# Altium PCB main.PcbDoc
Units mil, origin at the board's own origin, x right, y up, seen from the top; angles counter-clockwise.
Board outline 1417.32 x 1377.95 mil, 4 copper layers (Top Layer, Power Layer 1, Power Layer 2, Bottom Layer), stack 38.209 mil thick; 103 components, 59 nets, 337 pads, 182 vias.
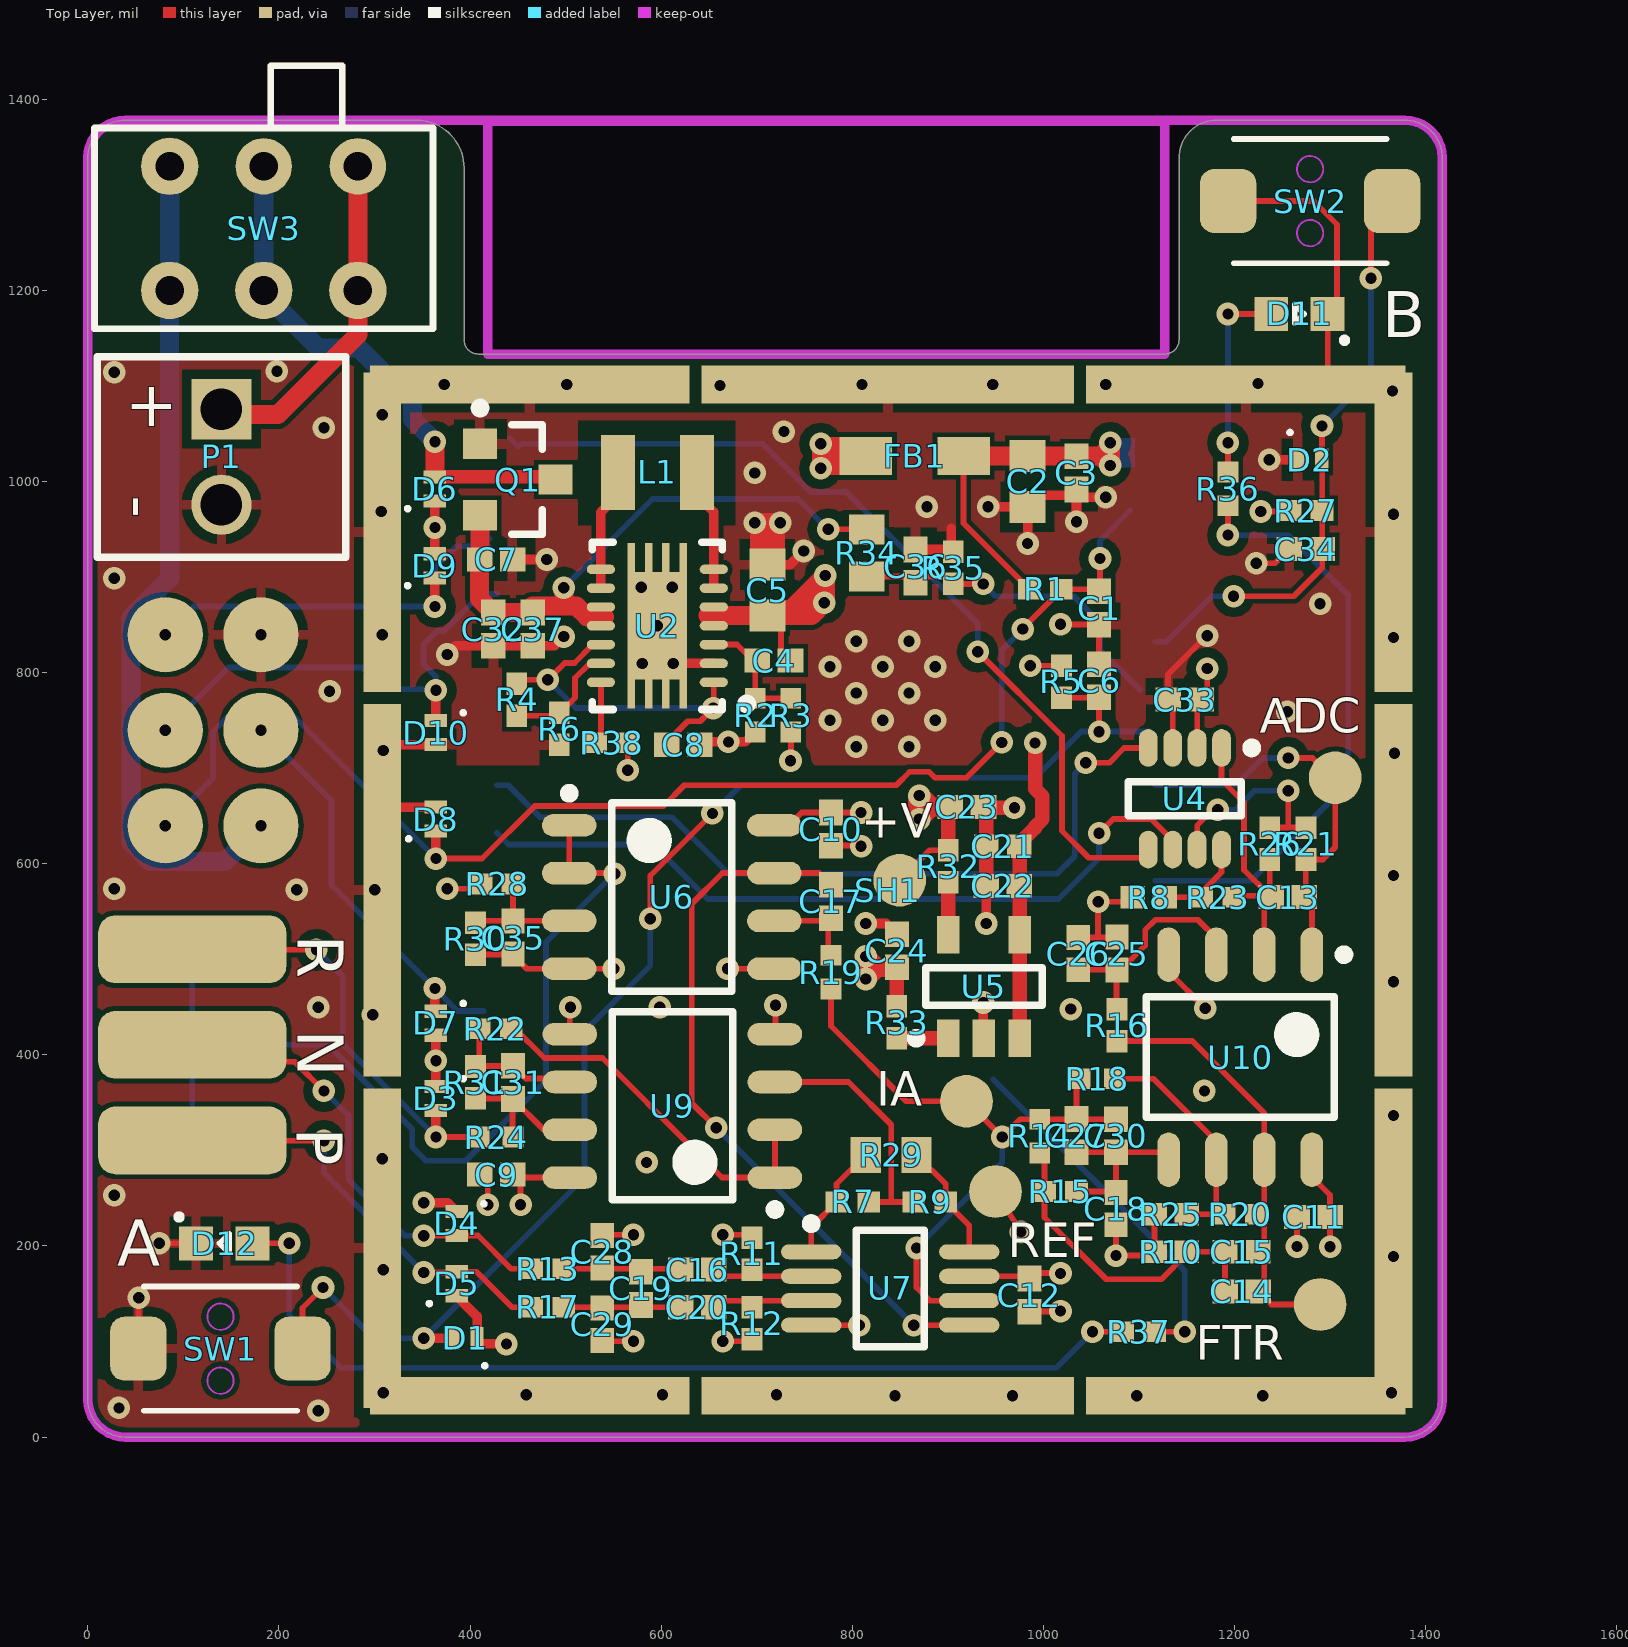
[diagram p0: Top Layer view]
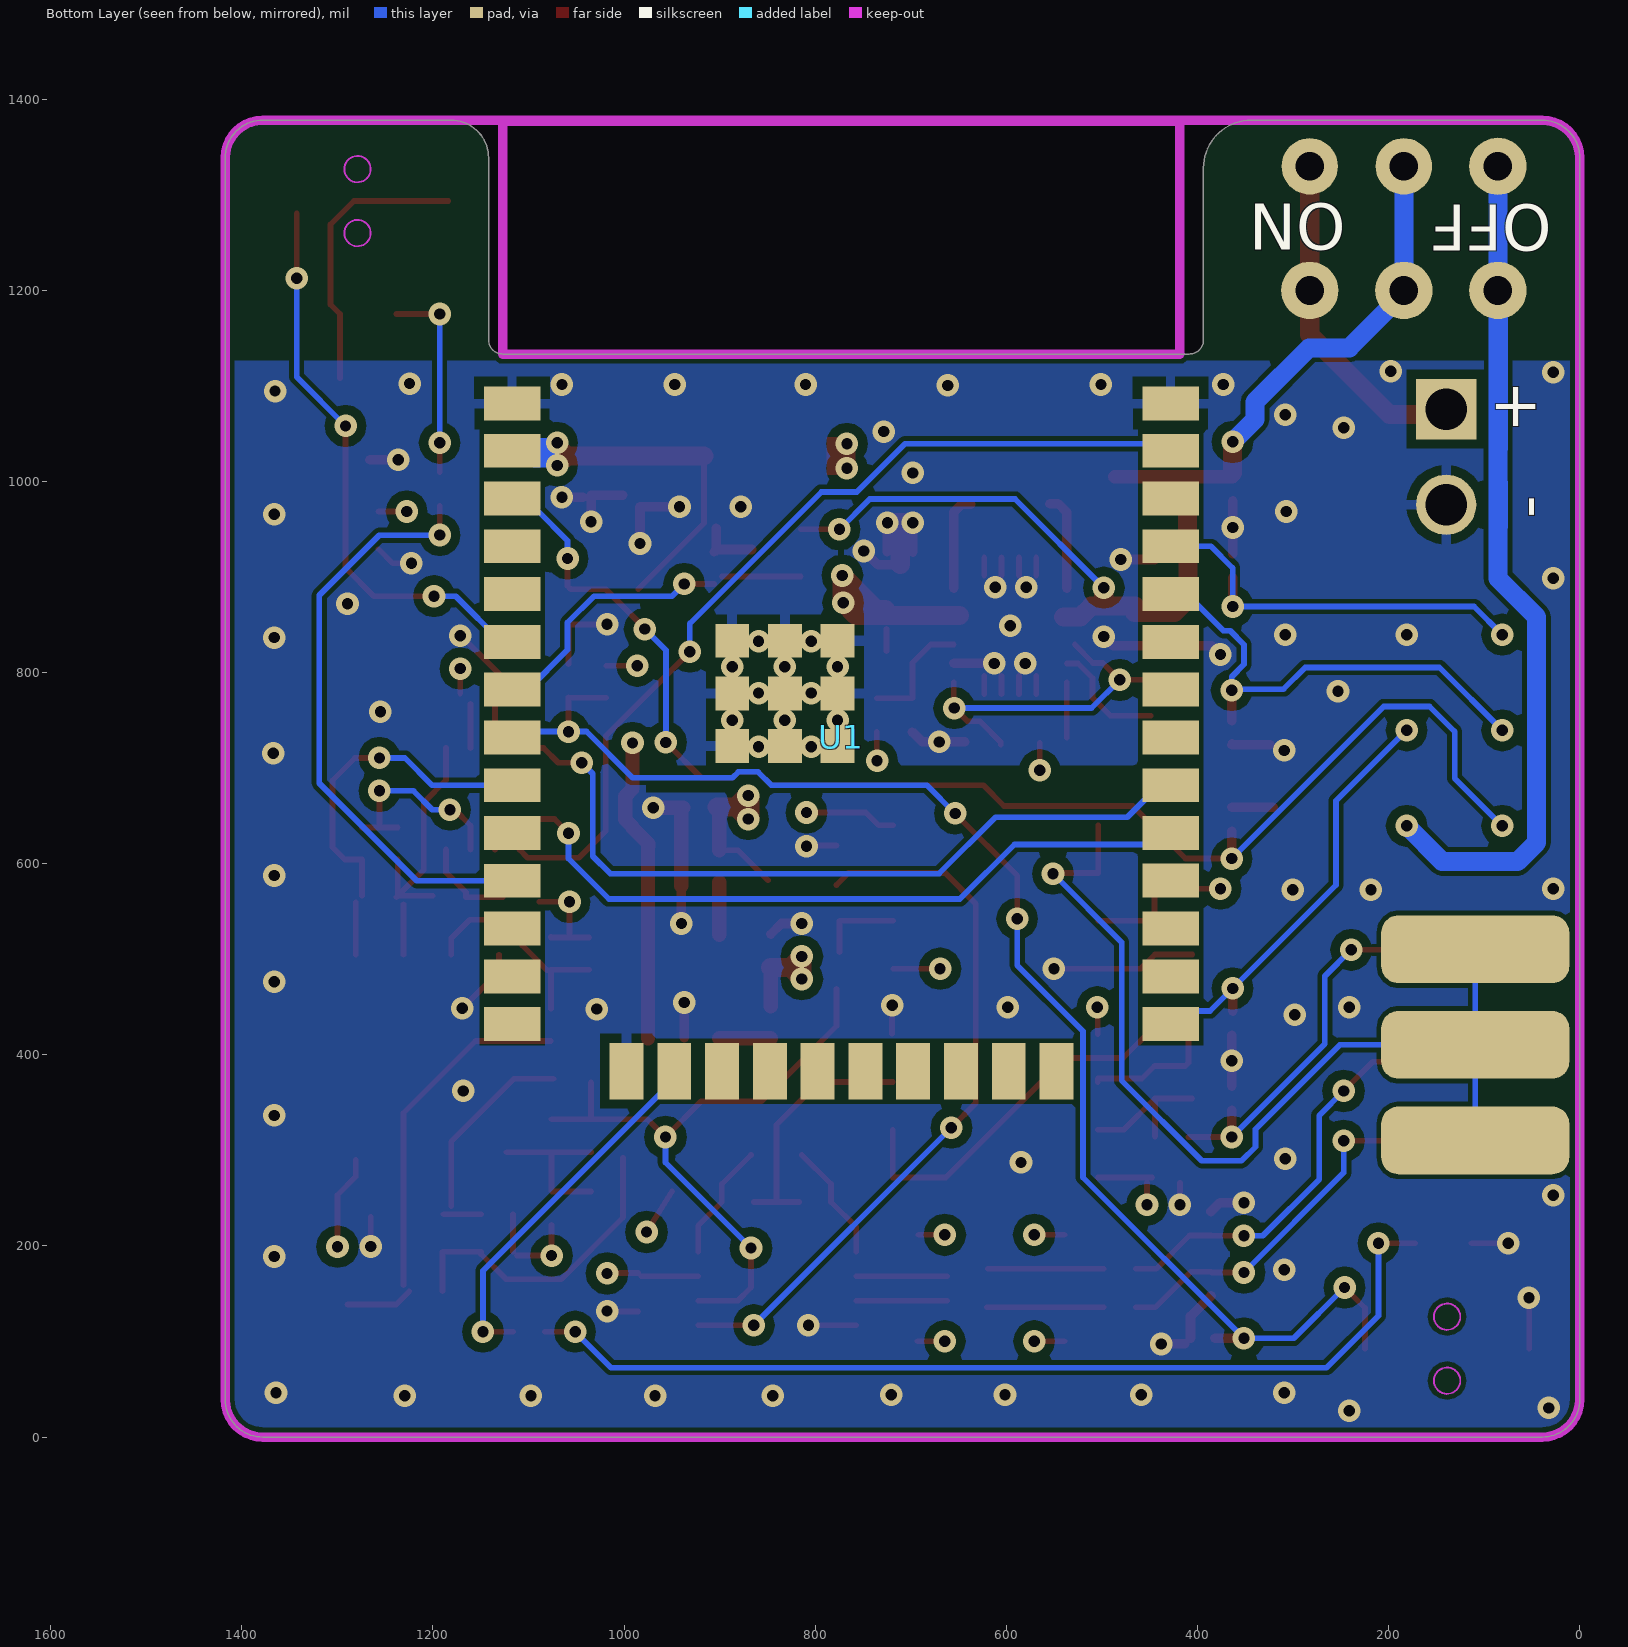
[diagram p1: Bottom Layer view, seen from below]
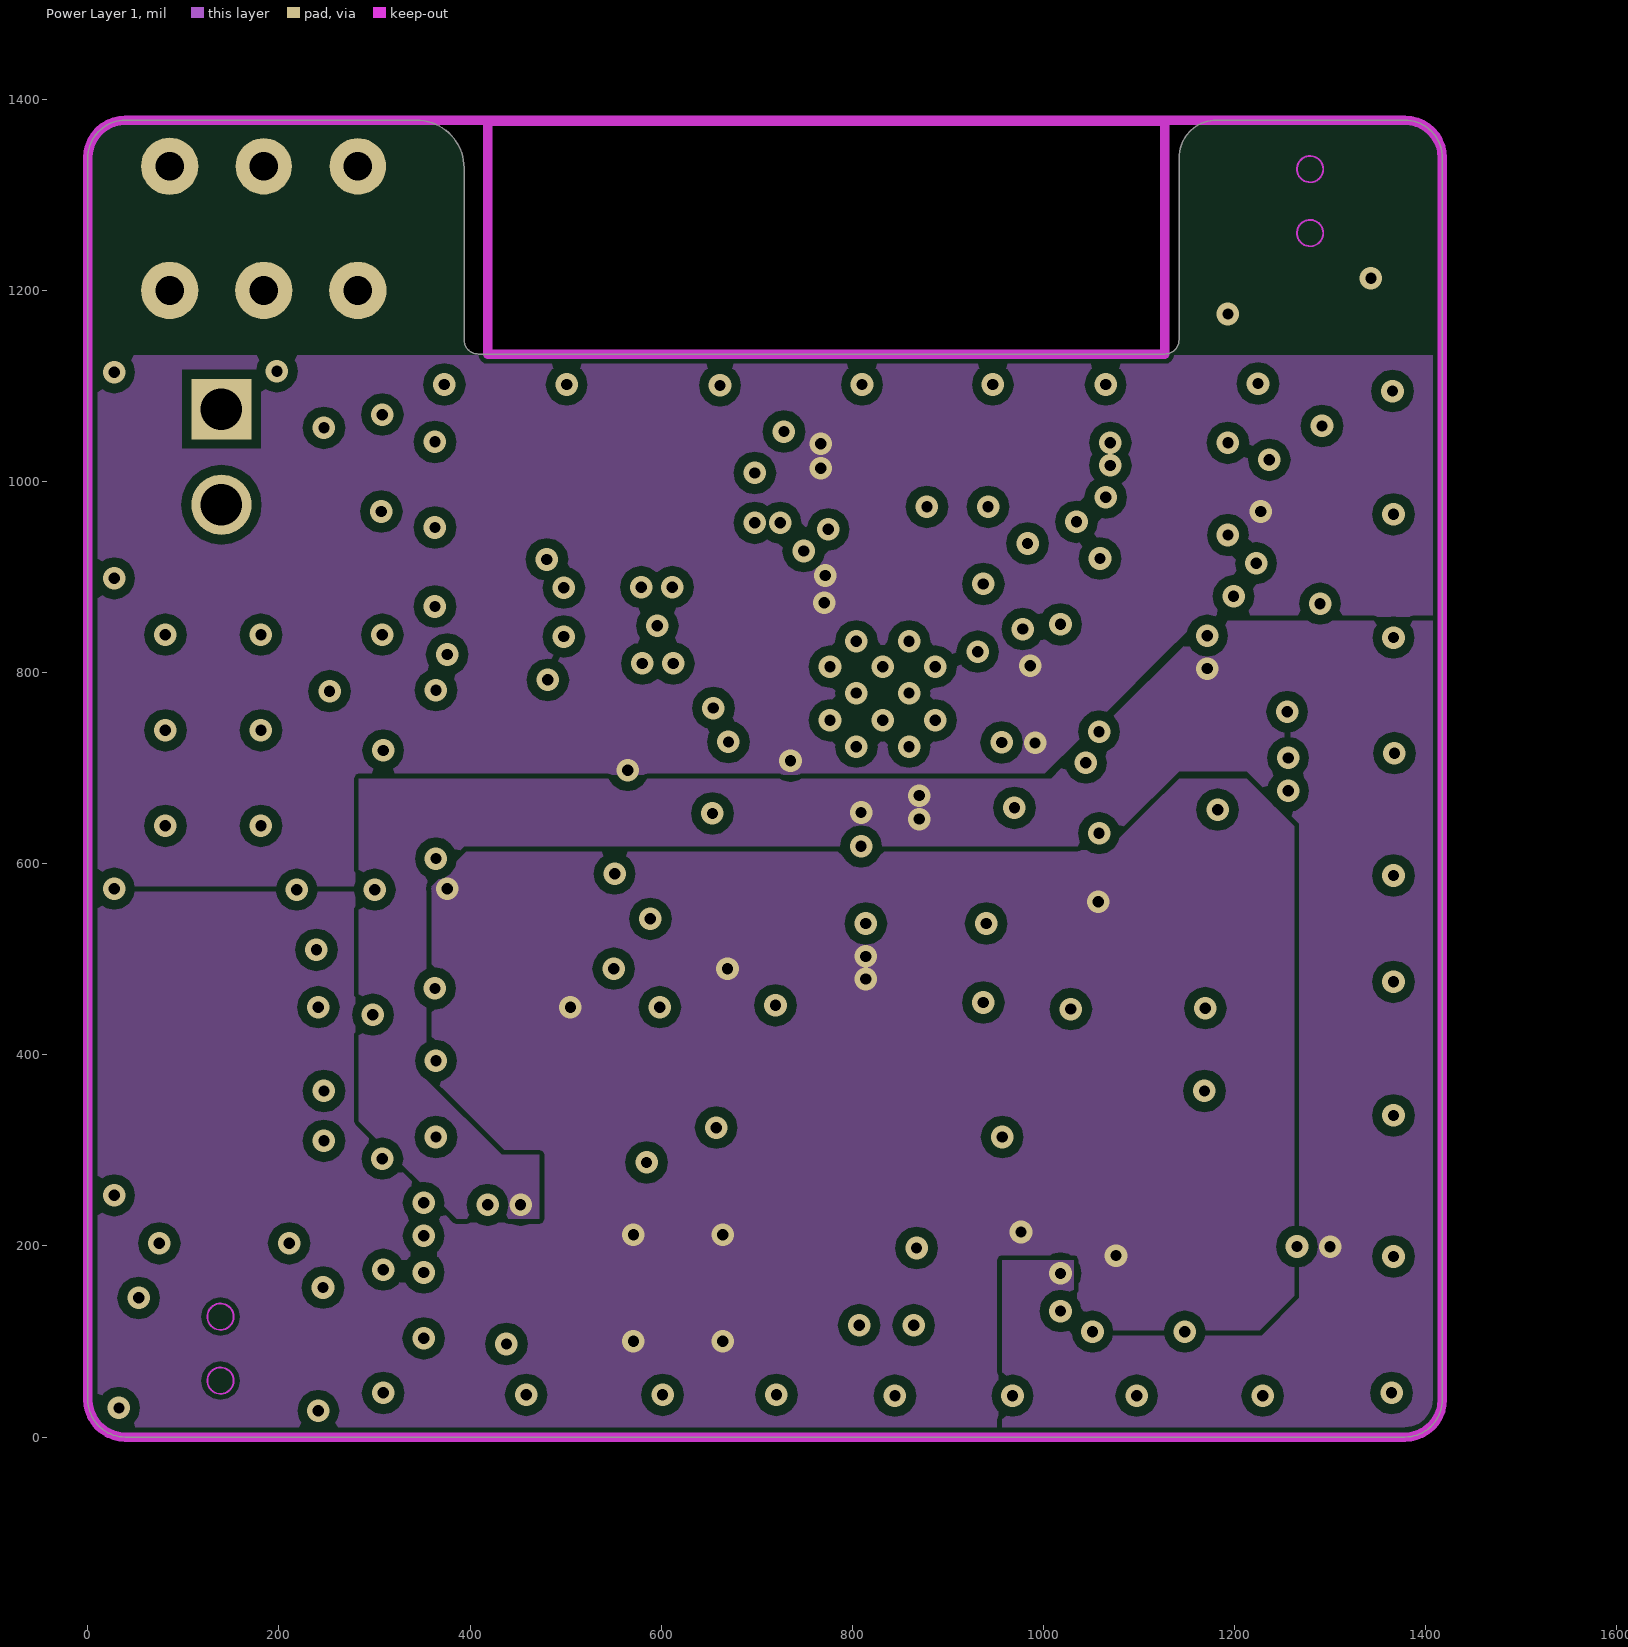
[diagram p2: Power Layer 1]
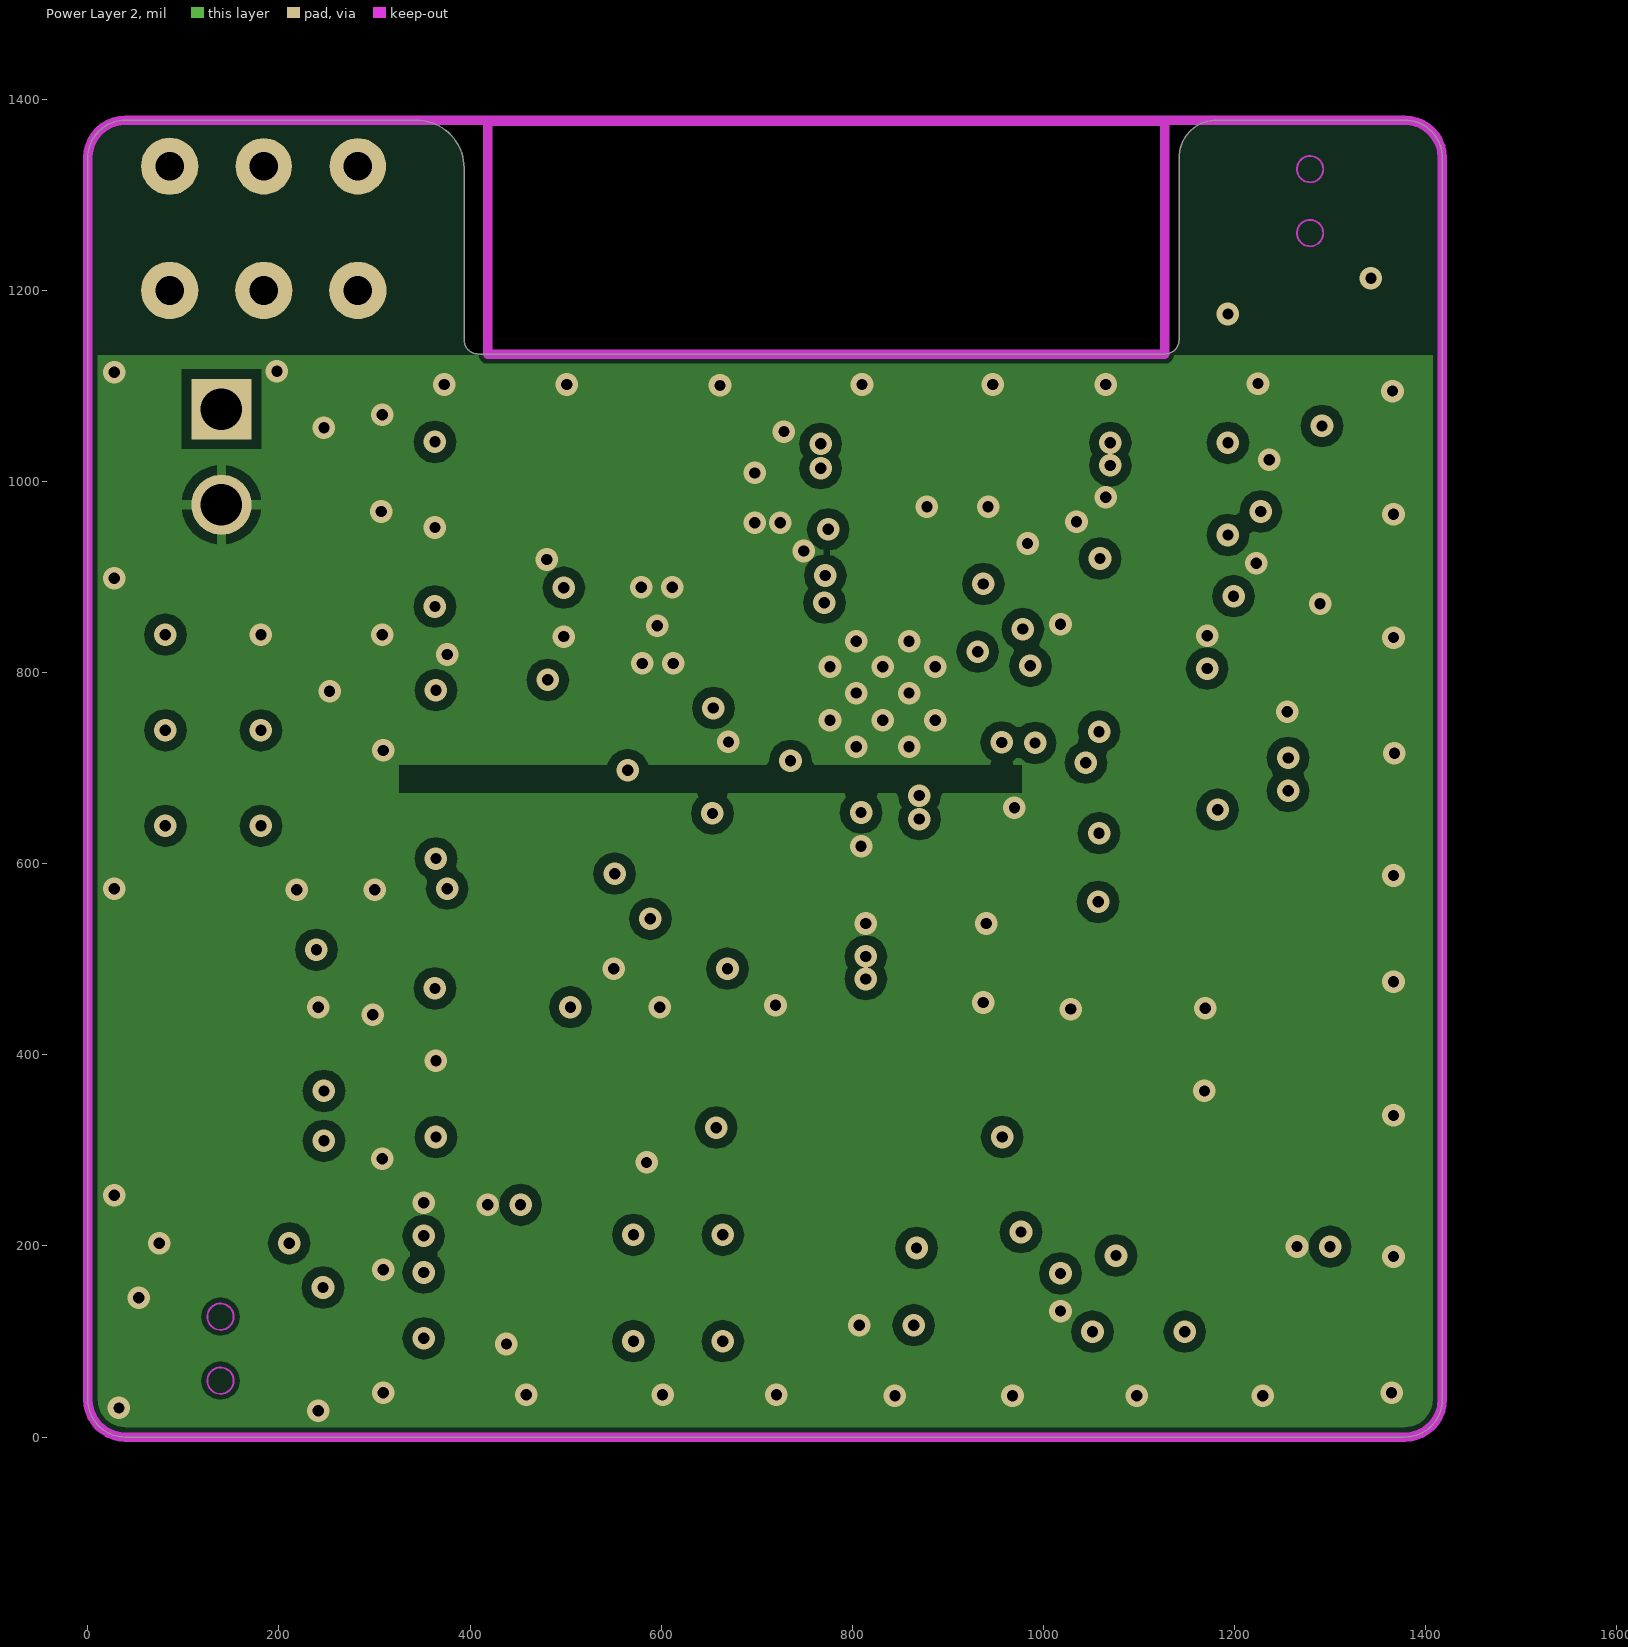
[diagram p3: Power Layer 2]

## Layer stack, top to bottom
Top Solder: solder mask 0.5, Solder Resist, Dk 3.8
Top Layer: signal copper 1.378
7628: prepreg 7.874, FR-4, Dk 4.6
Power Layer 1: signal copper 0.6988
Core: core 18.3071, FR-4, Dk 4.6
Power Layer 2: signal copper 0.6988
7628: prepreg 7.874, FR-4, Dk 4.6
Bottom Layer: signal copper 1.378
Bottom Solder: solder mask 0.5, Solder Resist, Dk 3.8

## Board outline
0,39.37 ccw(c39.37,39.37) 39.37,0 1377.95,0 ccw(c1377.95,39.37) 1417.32,39.37 1417.32,1338.58 ccw(c1377.95,1338.58) 1377.95,1377.95 1181.1,1377.95 ccw(c1181.1,1338.58) 1141.73,1338.58 1141.73,1148.03 cw(c1126.97,1148.03) 1126.97,1133.27 408.46,1133.27 cw(c408.46,1148.03) 393.7,1148.03 393.7,1327.95 ccw(c343.7,1327.95) 343.7,1377.95 39.37,1377.95 ccw(c39.37,1338.58) 0,1338.58

## Design rules (kind name [scope] priority, off if disabled: settings)
AssemblyTestPointUsage AssemblyTestPointUsage_1 [All] p2:
AssemblyTestpoint AssemblyTestpoint_1 [All] p2: testpointundercomponent=TRUE minsize=40 maxsize=100 preferedsize=60 minholesize=0 maxholesize=40 preferedholesize=32 testpointgrid=1 usegrid=TRUE gridtolerance=0.01 allowsidetop=TRUE allowsidebottom=TRUE
Clearance [All] p1: gap=10 ignorepadtopadclearanceinfootprint=FALSE except(0: Arc-Hole Track-Hole SMDPad-Hole THPad-Hole Via-Hole Fill-Hole Poly-Hole Region-Hole Text-Hole)
Clearance RF_Clearance [InNetClass('RF')] p2: gap=10 ignorepadtopadclearanceinfootprint=FALSE except(0: Arc-Hole Track-Hole SMDPad-Hole THPad-Hole Via-Hole Fill-Hole Poly-Hole Region-Hole Text-Hole; 5: Arc-Arc Arc-Track Arc-SMDPad Arc-Fill Arc-Region Track-Track Track-SMDPad Track-Fill Track-Region SMDPad-SMDPad SMDPad-THPad SMDPad-Fill SMDPad-Region Fill-Fill Fill-Region Region-Region; 12.99: Arc-THPad Track-THPad; 21.26: THPad-THPad; 34.65: Arc-Poly Track-Poly SMDPad-Poly THPad-Poly Via-Poly Fill-Poly Poly-Poly Poly-Region Poly-Text)
Clearance Clearance_1 [All] p3: gap=10 ignorepadtopadclearanceinfootprint=FALSE except(0: Arc-Hole Track-Hole SMDPad-Hole THPad-Hole Via-Hole Fill-Hole Poly-Hole Region-Hole Text-Hole; 5: Arc-Arc Arc-Track Arc-SMDPad Arc-Fill Arc-Poly Arc-Region Track-Track Track-SMDPad Track-Fill Track-Poly Track-Region SMDPad-SMDPad SMDPad-THPad SMDPad-Fill SMDPad-Poly SMDPad-Region Fill-Fill Fill-Poly Fill-Region Poly-Poly Poly-Region Region-Region; 12.99: Arc-THPad Track-THPad; 21.26: THPad-THPad)
ComponentClearance ComponentClearance_1 [All] p2 off: gap=10 collisioncheckmode=3 verticalgap=10 showdistances=FALSE
DiffPairsRouting DiffPairsRouting_1 [All] p2: maxlimit=10 minlimit=10 mostfreqgap=10 toplayer_minwidth=15 toplayer_maxwidth=15 toplayer_prefwidth=15 midlayer1_minwidth=15 midlayer1_maxwidth=15 midlayer1_prefwidth=15 midlayer2_minwidth=15 midlayer2_maxwidth=15 midlayer2_prefwidth=15 bottomlayer_minwidth=15 bottomlayer_maxwidth=15 bottomlayer_prefwidth=15 maxuncoupledlength=500
FabricationTestPointUsage FabricationTestPointUsage_1 [All] p2: valid=0 allowmultiple=FALSE
FabricationTestpoint FabricationTestpoint_1 [All] p2: side=3 testpointundercomponent=TRUE minsize=40 maxsize=100 preferedsize=60 minholesize=0 maxholesize=40 preferedholesize=32 testpointgrid=1 allowsidetop=TRUE allowsidebottom=TRUE usegrid=TRUE gridtolerance=0.01
FanoutControl Fanout_LCC [IsLCC] p1: bgadir=Out bgaviamode=Centered fanoutstyle=Auto fanoutdirection=Alternating viagrid=1 // Fanout_LCC (Default Rule)
FanoutControl Fanout_BGA [IsBGA] p2: bgadir=Out bgaviamode=Centered fanoutstyle=Auto fanoutdirection=Alternating viagrid=1 // Fanout_BGA (Default Rule)
FanoutControl Fanout_Small [(CompPinCount < 5)] p3: bgadir=Out bgaviamode=Centered fanoutstyle=Auto fanoutdirection=OutThenIn viagrid=1 // Fanout_Small (Default Rule)
FanoutControl Fanout_SOIC [IsSOIC] p4: bgadir=Out bgaviamode=Centered fanoutstyle=Auto fanoutdirection=Alternating viagrid=1 // Fanout_SOIC (Default Rule)
FanoutControl Fanout_BGA_1 [IsBGA] p6: bgadir=Out bgaviamode=Centered fanoutstyle=Auto fanoutdirection=Alternating viagrid=1 // Fanout_BGA (Default Rule)
FanoutControl Fanout_LCC_1 [IsLCC] p7: bgadir=Out bgaviamode=Centered fanoutstyle=Auto fanoutdirection=Alternating viagrid=1 // Fanout_LCC (Default Rule)
FanoutControl Fanout_SOIC_1 [IsSOIC] p8: bgadir=Out bgaviamode=Centered fanoutstyle=Auto fanoutdirection=Alternating viagrid=1 // Fanout_SOIC (Default Rule)
FanoutControl Fanout_Small_1 [(CompPinCount < 5)] p9: bgadir=Out bgaviamode=Centered fanoutstyle=Auto fanoutdirection=OutThenIn viagrid=1 // Fanout_Small (Default Rule)
FanoutControl Fanout_Default_1 [All] p10: bgadir=Out bgaviamode=Centered fanoutstyle=Auto fanoutdirection=Alternating viagrid=1 // Fanout_Default (Default Rule)
Height Height_1 [All] p2: minheight=0 maxheight=1000 prefheight=500
HoleSize HoleSize_1 [All] p2: absolutevalues=TRUE maxlimit=250 minlimit=0.79 maxpercent=80.000 minpercent=20.000
HoleToHoleClearance HoleToHoleClearance_1 [All] p2: gap=10 allowstackedmicrovias=TRUE
LayerPairs LayerPairs_1 [All] p2: enforce=TRUE
MinimumAnnularRing [All] p1: minimumring=5.12
MinimumSolderMaskSliver MinimumSolderMaskSliver_1 [All] p2: minsoldermaskwidth=7.87
NetAntennae NetAntennae_1 [All] p2: netantennaetolerance=0
PasteMaskExpansion PasteMaskExpansion_1 [All] p2: expansion=0
PlaneClearance PlaneClearance_1 [All] p2: clearance=20
PlaneConnect PlaneConnect_1 [All] p2: planeconnectstyle=Direct reliefexpansion=20 reliefentries=4 reliefconductorwidth=10 reliefairgap=10
PolygonConnect [All] p1: connectstyle=Relief reliefconductorwidth=10 reliefentries=4 polygonreliefangle="90 Angle" airgapwidth=10
PolygonConnect PolygonConnect_Via [IsVia] p2: connectstyle=Direct reliefconductorwidth=10 reliefentries=4 polygonreliefangle="90 Angle" airgapwidth=10
PolygonConnect PolygonConnect_1 [All] p3: connectstyle=Relief reliefconductorwidth=10 reliefentries=4 polygonreliefangle="90 Angle" airgapwidth=10
RoutingCorners RoutingCorners_1 [All] p2: cornerstyle=45-Degree minsetback=100 maxsetback=100
RoutingLayers RoutingLayers_1 [All] p2: top layer_v5=TRUE mid layer 1_v5=TRUE mid layer 2_v5=TRUE bottom layer_v5=TRUE
RoutingPriority RoutingPriority_1 [All] p2: routingpriority=0
RoutingTopology RoutingTopology_1 [All] p2: topology=Shortest
RoutingVias [All] p1: holewidth=28 width=50 viastyle="Through Hole" minholewidth=28 minwidth=50 maxholewidth=28 maxwidth=50
RoutingVias RoutingVias_1 [All] p2: holewidth=39.37 width=23.62 viastyle="Through Hole" minholewidth=7.87 minwidth=17.72 maxholewidth=248.03 maxwidth=275.59
ShortCircuit ShortCircuit_1 [All] p2: allowed=FALSE
SilkToBoardRegionClearance SilkToBoardRegionClearance_1 [All] p2:
SilkToSilkClearance SilkToSilkClearance_1 [All] p2: silktosilkclearance=5.91
SilkToSolderMaskClearance SilkToSolderMaskClearance_1 [IsPad] p2: minsilkscreentomaskgap=5.91 clearancetoexposedcopper=TRUE
SolderMaskExpansion [All] p1: expansion=4 istentingtop=FALSE
SolderMaskExpansion SolderMaskExpansion_1 [All] p2: expansion=4 istentingtop=FALSE
UnRoutedNet UnRoutedNet_1 [All] p2:
UnpouredPolygon UnpouredPolygon_1 [All] p2:
Width [All] p1: maxlimit=10 minlimit=10 preferedwidth=10
Width Width_1 [All] p2: maxlimit=100 minlimit=3.5 preferedwidth=10 midlayer1_minwidth=5 midlayer1_maxwidth=50 midlayer2_minwidth=5 midlayer2_maxwidth=50 minimp=50.000000 maximp=50.000000 favimp=50.000000
26 further rules are at their usual default settings.

## Components (designator, comment, footprint, x,y, rotation, side; value= is the part's Value field where it differs from the comment)
C1 "100nF" CAPC1005X56X25NL10T15 1058.07,867.52 r270 top
C2 "Murata GRM188R60G226MEA0L" CAPC1608X90X35NL10T15 983.27,1000 r270 top
C3 "100nF" CAPC1005X56X25NL10T15 1034.45,1008.86 r270 top
C4 "AVX Interconnect / Elco 04025A6R0DAT2A" CAPC1005X60X25NL10T15 717.91,812.5 r180 top
C5 "Murata GRM188R60G226MEA0L" CAPC1608X90X35NL10T15 711.02,886.32 r90 top
C6 "100nF" CAPC1005X56X25NL10T15 1058.07,791.34 r90 top
C7 "100nF" CAPC1005X56X25NL10T15 427.17,918.31 r0 top
C8 "100nF" CAPC1005X56X25NL10T15 623.03,724.41 r0 top
C9 "100nF" CAPC1005X56X25NL10T15 427.16,274.61 r180 top
C10 "100nF" CAPC1005X56X25NL10T15 777.56,636.22 r270 top
C11 "100nF" CAPC1005X56X25NL10T15 1282.48,230.32 r180 top
C12 "100nF" CAPC1005X56X25NL10T15 985.24,148.62 r270 top
C13 "AVX Interconnect / Elco 04025C152KAT2A" CAPC1005X56X25NL10T15 1255.51,564.96 r180 top
C14 "AVX Interconnect / Elco 0402ZD474KAT2A" CAPC1005X56X25NL10T15 1207.28,152.56 r0 top
C15 "CL05A334KQ5NNNC" CAPC1005X55X25NL05T10 1207.28,193.9 r180 top
C16 "CL05A475MP5NRNC" CAPC1005X56X25NL10T15 637.8,175.2 r0 top
C17 "Samsung CL05A105KA5NQNC" PCB-515da9ytrm2wahx6tw11-1 777.56,560.43 r90 top
C18 "Kemet C0402C683K4RACTU" CAPC1005X55X30NL05T10 1075.79,239.17 r90 top
C19 "AVX Interconnect / Elco 04025C332KAT2A" CAPC1005X56X25NL10T15 578.74,155.51 r90 top
C20 "CL05A475MP5NRNC" CAPC1005X56X25NL10T15 637.8,135.83 r180 top
C21 "Murata GRM155R61C105KA12D" CAPC1005X55X25NL05T10 957.28,618.11 r180 top
C22 "100nF" CAPC1005X56X25NL10T15 957.28,576.77 r180 top
C23 "100nF" CAPC1005X56X25NL10T15 919.88,659.45 r0 top
C24 "100nF" CAPC1005X56X25NL10T15 846.46,508.86 r90 top
C25 "CL05A334KQ5NNNC" CAPC1005X55X25NL05T10 1076.77,505.91 r270 top
C26 "Kemet C0402C683K4RACTU" CAPC1005X55X30NL05T10 1036.42,505.91 r270 top
C27 "AVX Interconnect / Elco 04023C473KAT2A" CAPC1005X56X25NL10T15 1034.45,315.55 r270 top
C28 "Kemet C0402C221K5RACAUTO" CAPC1005X55X30NL05T10 538.39,193.9 r90 top
C29 "Kemet C0402C221K5RACAUTO" CAPC1005X55X30NL05T10 538.39,118.11 r270 top
C30 "100nF" CAPC1005X56X25NL10T15 1075.79,315.36 r270 top
C31 "AVX Interconnect / Elco 04025A151JAT2A" CAPC1005X56X25NL10T15 444.88,371.06 r90 top
C32 "Samsung CL05A106MQ5NUNC" PCB-a41llqp6xpt8gy62f2hk-1 424.21,845.47 r270 top
C33 "100nF" CAPC1005X56X25NL10T15 1147.64,771.65 r180 top
C34 "100nF" CAPC1005X56X25NL10T15 1274.21,929.14 r180 top
C35 "Murata GRM155R61C105KA12D" CAPC1005X55X25NL05T10 444.88,522.64 r270 top
C36 "100nF" CAPC1005X56X25NL10T15 866.14,911.42 r90 top
C37 "Samsung CL05A106MQ5NUNC" PCB-a41llqp6xpt8gy62f2hk-1 465.55,845.47 r270 top
D1 "LESD8D3.3CT5G" DFN64P100X50-2N 394.69,103.35 r180 top
D2 "LESD8D3.3CT5G" DFN64P100X50-2N 1278.54,1022.64 r0 top
D3 "LESD8D3.3CT5G" DFN64P100X50-2N 364.17,354.33 r270 top
D4 "LESD8D3.3CT5G" DFN64P100X50-2N 385.83,223.43 r270 top
D5 "LESD8D3.3CT5G" DFN64P100X50-2N 385.83,160.43 r90 top
D6 "LESD8D3.3CT5G" DFN64P100X50-2N 363.19,992.13 r90 top
D7 "LESD8D3.3CT5G" DFN64P100X50-2N 364.17,433.07 r270 top
D8 "LESD8D3.3CT5G" DFN64P100X50-2N 364.17,646.65 r90 top
D9 "LESD8D3.3CT5G" DFN64P100X50-2N 363.19,911.61 r90 top
D10 "LESD8D3.3CT5G" DFN64P100X50-2N 364.17,737.2 r270 top
D11 "19-217/GHC-YR1S2/3T" PCB-qrh50x9m6cshxb6d9t7t-1 1267.72,1175.2 r180 top
D12 "KT-0603R" PCB-qrh50x9m6cshxb6d9t7t-1 142.72,202.76 r0 top
FB1 "GZ2012D601TF" MURA-BLM21-H1-CHIP-2_V 865.16,1026.58 r0 top
L1 "Laird MGV252012S2R2M-10" INDM2520X12N 595.87,1009.35 r0 top
P1 "TE 282834-2" PCB-6xrngco598u3mra2uzi2-1 139.76,1025.59 r270 top
Q1 "AO3401A" PCB-kx100zt0qwbp6gbfpfbn-1 449.8,1001.97 r0 top
R1 "Yageo / Phycomp RC0402FR-1310KL" RESC1005X40X25NL05T10 1001.97,887.21 r0 top
R2 "Panasonic ERJ-2RKF8872X" RESC1005X40X25NL05T05 698.23,755.41 r90 top
R3 "Vishay Dale CRCW0402510KFKED" RESC1005X40X25NL05T05 735.63,755.41 r270 top
R4 "Yageo AC0402JR-070RL" RESC1005X37X25NL05T10 448.82,771.65 r90 top
R5 "Yageo / Phycomp RC0402FR-1310KL" RESC1005X40X25NL05T10 1018.7,790.35 r270 top
R6 "Yageo AC0402JR-070RL" RESC1005X37X25NL05T10 493.11,741.14 r270 top
R7 "Yageo / Phycomp RC0402FR-0724KL" RESC1005X40X25NL05T10 800.2,246.06 r0 top
R8 "KOA Speer RK73H1ETTP1001F" RESC1005X40X25NL10T10 1110.24,564.96 r180 top
R9 "Yageo / Phycomp RC0402FR-0724KL" RESC1005X40X25NL05T10 880.91,246.06 r0 top
R10 "KOA Speer RK73H1ETTP2003F" RESC1005X40X25NL10T10 1132.87,193.9 r0 top
R11 "Yageo RC0402FR-13100KL" RESC1005X40X25NL05T10 694.88,191.93 r270 top
R12 "Yageo RC0402FR-13100KL" RESC1005X40X25NL05T10 694.88,119.1 r90 top
R13 "Yageo RC0402FR-13100KL" RESC1005X40X25NL05T10 481.3,176.18 r180 top
R14 "Vishay Dale CRCW04026K80FKED" RESC1005X40X25NL05T05 996.06,314.96 r270 top
R15 "Yageo / Phycomp RC0402FR-0716KL" RESC1005X40X25NL05T10 1017.72,256.89 r0 top
R16 "Yageo / Phycomp RC0402FR-0711KL" RESC1005X40X25NL05T10 1076.77,431.1 r270 top
R17 "Yageo RC0402FR-13100KL" RESC1005X40X25NL05T10 481.3,135.83 r180 top
R18 "Panasonic ERJ-2RKF2002X" RESC1005X40X25NL05T05 1056.1,375 r180 top
R19 "Vishay Dale CRCW0402330KFKED" RESC1005X40X25NL05T05 777.56,486.62 r270 top
R20 "Yageo / Phycomp RC0402FR-1310KL" RESC1005X40X25NL05T10 1205.71,233.27 r180 top
R21 "Yageo AC0402FR-078K2L" RESC1005X37X25NL05T10 1274.61,621.06 r270 top
R22 "Yageo / Phycomp RC0402FR-1310KL" RESC1005X40X25NL05T10 426.18,427.17 r0 top
R23 "Yageo / Phycomp RC0402FR-1310KL" RESC1005X40X25NL05T10 1182.09,564.96 r0 top
R24 "Vishay Dale CRCW0402330KFKED" RESC1005X40X25NL05T05 427.17,313.98 r0 top
R25 "KOA Speer RK73H1ETTP2003F" RESC1005X40X25NL10T10 1132.87,233.27 r0 top
R26 "Yageo / Phycomp RC0402FR-1310KL" RESC1005X40X25NL05T10 1236.81,621.06 r270 top
R27 "Yageo / Phycomp RC0402FR-1310KL" RESC1005X40X25NL05T10 1274.61,969.49 r0 top
R28 "Yageo AC0402JR-070RL" RESC1005X37X25NL05T10 428.15,578.74 r180 top
R29 "Panasonic ERJ-3EKF71R5V" RESC1608X55X30NL15T15 840.55,295.28 r0 top
R30 "Yageo AC0402JR-070RL" RESC1005X37X25NL05T10 405.51,521.65 r90 top
R31 "Yageo AC0402FR-071ML" RESC1005X37X25NL05T10 405.51,371.06 r270 top
R32 "Yageo AC0402JR-070RL" RESC1005X37X25NL05T10 900.2,597.44 r270 top
R33 "Yageo AC0402JR-070RL" RESC1005X37X25NL05T10 846.46,434.06 r270 top
R34 "Vishay Dale CRCW0603680KFKEA" RESC1609X50X30NL10T20 814.96,925.2 r270 top
R35 "Yageo AC0402FR-071ML" RESC1005X37X25NL05T10 905.51,909.45 r90 top
R36 "Vishay Dale CRCW0402220RFKED" RESC1005X40X25NL05T05 1192.91,992.13 r270 top
R37 "Panasonic ERJ-U02F1001X" RESC1005X40X25NL05T10 1099.41,110.24 r0 top
R38 "Yageo AC0402FR-071ML" RESC1005X37X25NL05T10 548.23,726.38 r0 top
SH1 "Leader Tech SMS-403C" PCB-mz3zksww60jqn1djdwiu-1 1366.14,1101.38 r270 top locked
SW1 "TS-1185-C-A-A-A" PCB-qarcnbrnejma51b9hfzm-1 138.78,92.52 r0 top
SW2 "TS-1185-C-A-A-A" PCB-qarcnbrnejma51b9hfzm-1 1278.91,1293.31 r0 top
SW3 "JS202011AQN" PCB-wbq3apgbd2bliremr4t3-1 361.22,1199.8 r180 top
U1 "Espressif Systems ESP32-WROOM-32E" ESP32-WROOM-32E 1126.97,373.03 r180 bottom locked
U2 "TPS63020DSJR" QFN50P300X400X100_HS-15N 595.87,848.92 r180 top
U4 "Analog Devices AD5160BRJZ10-RL7" TSOP65P280X145-8N 1147.91,667.95 r270 top
U5 "REF1933AIDDCT" SOT95P280X100-5N 937.6,471.46 r90 top
U6 "MCP6002T-I/SN" SOIC127P600X175-8N 610.98,565.16 r0 top
U7 "INA126EA/2K5" TI-DGK8_N 839.57,155.51 r0 top
U9 "MCP6002T-I/SN" SOIC127P600X175-8N 611.61,346.58 r180 top
U10 "MCP6002T-I/SN" SOIC127P600X175-8N 1205.83,397.52 r270 top

## Footprints (in the part's own frame and the unit in brackets; to place one, negate y for a bottom-side part, rotate by r counter-clockwise, add the part's x,y. Pads: shape width x height; smd on the part's side, far side on the other; paste and mask are expansions set on the pad)
CAPC1005X55X25NL05T10 [mm] "CAPC1005X55X25NL05T10"
  rect 0.66x0.62 smd: 1(-0.44,0) 2(0.44,0)
  body extent -0.53,-0.28 0.53,0.27, height 0.55
CAPC1005X55X30NL05T10 [mm] "CAPC1005X55X30NL05T10"
  rect 0.66x0.62 smd: 1(-0.43,0) 2(0.43,0)
  body extent -0.53,-0.28 0.53,0.27, height 0.55
CAPC1005X56X25NL10T15 [mm] "CAPC1005X56X25NL10T15"
  rect 0.68x0.64 smd: 1(-0.44,0) 2(0.44,0)
  body extent -0.55,-0.3 0.55,0.3, height 0.56
CAPC1005X60X25NL10T15 [mm] "CAPC1005X60X25NL10T15"
  rect 0.68x0.64 smd: 1(-0.44,0) 2(0.44,0)
  body extent -0.55,-0.3 0.55,0.3, height 0.6
CAPC1608X90X35NL10T15 [mm] "CAPC1608X90X35NL10T15"
  rect 0.85x0.95 smd: 1(-0.675,0) 2(0.675,0)
  body extent -0.85,-0.45 0.85,0.45, height 0.9
DFN64P100X50-2N [mm] "DFN, 2-Leads, Body 0.60x1.00mm, Pitch 0.64mm, IPC Medium Density"
  rect 0.35x0.6 smd: 1(-0.32,0) 2(0.32,0)
  silkscreen extent -0.58,0.68 -0.48,0.77, body extent -0.53,-0.33 0.53,0.33, height 0.5
ESP32-WROOM-32E [mm] "ESP32-WROOM-32E"
  rect 1.5x0.9 smd: 1(0.25,18) 2(0.25,16.74) 3(0.25,15.47) 4(0.25,14.2) 5(0.25,12.93) 6(0.25,11.66) 7(0.25,10.39) 8(0.25,9.12) 9(0.25,7.85) 10(0.25,6.58) 11(0.25,5.31) 12(0.25,4.04) 13(0.25,2.77) 14(0.25,1.5) 25(17.75,1.5) 26(17.75,2.77) 27(17.75,4.04) 28(17.75,5.32) 29(17.75,6.58) 30(17.75,7.85) 31(17.75,9.12) 32(17.75,10.39) 33(17.75,11.66) 34(17.75,12.93) 35(17.75,14.2) 36(17.75,15.47) 37(17.75,16.74) 38(17.75,18)
  rect 0.9x1.5 smd: 15(3.29,0.25) 16(4.56,0.25) 17(5.83,0.25) 18(7.1,0.25) 19(8.37,0.25) 20(9.64,0.25) 21(10.91,0.25) 22(12.18,0.25) 23(13.45,0.25) 24(14.72,0.25)
  rect 0.9x0.9 smd: 39(6.1,8.89) 39(6.1,10.29) 39(6.1,11.69) 39(7.5,8.89) 39(7.5,10.29) 39(7.5,11.69) 39(8.9,8.89) 39(8.9,10.29) 39(8.9,11.69)
  Keep-Out Layer lines w0.254: 18,19.31 18,25.5 0,25.5 0,19.31 18,19.31
  body extent 0,0 18,25.5, height 3.2
INDM2520X12N [mm] "Molded Inductor, 2-Leads, Body 2.50x2.00mm, IPC Medium Density"
  rect 0.9x2 smd: 1(-1.05,0) 2(1.05,0)
  body extent -1.35,-1.1 1.35,1.1, height 1.2
MURA-BLM21-H1-CHIP-2_V [mm] "Chip Ferrite Bead, 2-Leads, Body 2x1.25mm, Height 1.05mm"
  rect 1.4x1 smd: 1(-1.3,0) 2(1.3,0)
  body extent -1,-0.63 1,0.63, height 1.05
PCB-6xrngco598u3mra2uzi2-1 [mm] "terminal block 2x20cts, Pitch 2.54mm"
  rect 1.6x1.6 hole 1.1: 1(-1.27,0)
  round 1.6 hole 1.1: 2(1.27,0)
  silkscreen extent -2.67,-3.3 2.67,3.3, body extent -2.77,-3.25 2.77,3.25, height 10.16
PCB-515da9ytrm2wahx6tw11-1 [mm] "CAPC1005X56X25NL10T15"
  rect 0.68x0.64 smd: 1(-0.44,0) 2(0.44,0)
  body extent -0.55,-0.3 0.55,0.3, height 0.56
PCB-a41llqp6xpt8gy62f2hk-1 [mm] "CAPC1005X56X25NL10T15"
  rect 0.68x0.64 smd: 1(-0.44,0) 2(0.44,0)
  body extent -0.55,-0.3 0.55,0.3, height 0.56
PCB-kx100zt0qwbp6gbfpfbn-1 [mm] "SOT23, 3-Leads, Body 2.92x1.3mm, Pitch 0.95mm"
  rect 0.9x0.8 smd: 1(-1,0.95) 2(-1,-0.95) 3(1,0)
  silkscreen extent -1.12,-1.46 0.65,2.02, body extent -0.65,-1.46 0.65,1.46, height 1.11
PCB-mz3zksww60jqn1djdwiu-1 [mm]
  rect 1x8.5 smd: 1(0,-3.925) 1(0,-22.955) 1(26.88,-3.925) 1(26.88,-22.955)
  rect 1x9.9 smd: 1(0,-13.44) 1(26.88,-13.44)
  rect 8.5x1 smd: 1(3.925,0) 1(3.925,-26.88) 1(22.955,0) 1(22.955,-26.88)
  rect 9.9x1 smd: 1(13.44,0) 1(13.44,-26.88)
PCB-qarcnbrnejma51b9hfzm-1 [mm]
  rrect50% 1.5x1.7 smd: 1(-2.18,0) 2(2.18,0)
  Keep-Out Layer circle w0.051: c0,0.85 r0.35
  Keep-Out Layer circle w0.051: c0,-0.85 r0.35
  Multi-Layer pour cut-out: 0,0.5 -0.134,0.527 -0.247,0.603 -0.323,0.716 -0.35,0.85 -0.35,0.85 -0.35,0.85 -0.323,0.984 -0.247,1.097 -0.134,1.173 0,1.2 0,1.2 0,1.2 0.134,1.173 0.247,1.097 0.323,0.984 0.35,0.85 0.35,0.85 0.323,0.716 0.247,0.603 0.134,0.527 0,0.5
  silkscreen extent -2.03,-1.65 2.03,1.65, body extent -2.5,-1.5 2.5,1.5, height 2
PCB-qrh50x9m6cshxb6d9t7t-1 [mm] "DSMD0603GRID25PAD90"
  rect 0.9x0.9 smd: 1(0.75,0) 2(-0.75,0)
  silkscreen extent -1.28,-0.25 0.13,0.77, body extent -0.87,-0.48 0.87,0.47, height 0.92
PCB-wbq3apgbd2bliremr4t3-1 [mm]
  round 1.5 hole 0.75: 1(2,-3.3) 2(4.5,-3.3)
  round 1.524 hole 0.762: 3(7,-3.3) 4(2,0) 5(4.5,0) 6(7,0)
  silkscreen extent 0,-5.97 9,1.02, body extent 0,-5.45 9,0.15, height 3.22
QFN50P300X400X100_HS-15N [mm] "QFN, 14-Leads, Body 3.00x4.00mm, Pitch 0.50mm, Thermal Pad 1.58x2.85mm, IPC Medium Density"
  oval 0.75x0.25 smd: 1(-1.5,1.5) 2(-1.5,1) 3(-1.5,0.5) 4(-1.5,0) 5(-1.5,-0.5) 6(-1.5,-1) 7(-1.5,-1.5) 8(1.5,-1.5) 9(1.5,-1) 10(1.5,-0.5) 11(1.5,0) 12(1.5,0.5) 13(1.5,1) 14(1.5,1.5)
  rect 0.2x0.775 smd: 15(-0.69,1.813) 15(-0.69,-1.813) 15(-0.23,1.813) 15(-0.23,-1.813) 15(0.23,1.813) 15(0.23,-1.813) 15(0.69,1.813) 15(0.69,-1.813)
  rect 1.58x2.85 smd: 15(0,0)
  silkscreen extent -2.5,-2.22 1.73,2.23, body extent -1.58,-2.07 1.58,2.08, height 1
RESC1005X37X25NL05T10 [mm] "RESC1005X37X25NL05T10"
  rect 0.6x0.55 smd: 1(-0.425,0) 2(0.425,0)
  body extent -0.53,-0.27 0.53,0.28, height 0.37
RESC1005X40X25NL05T05 [mm] "RESC1005X40X25NL05T05"
  rect 0.55x0.55 smd: 1(-0.45,0) 2(0.45,0)
  body extent -0.53,-0.27 0.53,0.28, height 0.4
RESC1005X40X25NL05T10 [mm] "RESC1005X40X25NL05T10"
  rect 0.6x0.55 smd: 1(-0.425,0) 2(0.425,0)
  body extent -0.53,-0.27 0.53,0.28, height 0.4
RESC1005X40X25NL10T10 [mm] "RESC1005X40X25NL10T10"
  rect 0.65x0.6 smd: 1(-0.425,0) 2(0.425,0)
  body extent -0.55,-0.3 0.55,0.3, height 0.4
RESC1608X55X30NL15T15 [mm] "RESC1608X55X30NL15T15"
  rect 0.8x0.95 smd: 1(-0.675,0) 2(0.675,0)
  body extent -0.87,-0.48 0.87,0.48, height 0.55
RESC1609X50X30NL10T20 [mm] "RESC1609X50X30NL10T20"
  rect 0.8x0.95 smd: 1(-0.625,0) 2(0.625,0)
  body extent -0.82,-0.48 0.82,0.48, height 0.5
SOIC127P600X175-8N [mm] "SOIC, 8-Leads, Body 4.90x3.90mm, Pitch 1.27mm, IPC Medium Density"
  oval 1.45x0.6 smd: 1(-2.725,1.905) 2(-2.725,0.635) 3(-2.725,-0.635) 4(-2.725,-1.905) 5(2.725,-1.905) 6(2.725,-0.635) 7(2.725,0.635) 8(2.725,1.905)
  silkscreen extent -2.85,-2.5 1.6,2.88, body extent -2,-2.5 2,2.5, height 1.75
SOT95P280X100-5N [mm] "SOT23, 5-Leads, Body 2.90x2.80mm, Pitch 0.95mm, IPC Medium Density"
  rect 1x0.6 smd: 1(-1.375,0.95) 2(-1.375,0) 3(-1.375,-0.95) 4(1.375,-0.95) 5(1.375,0.95)
  silkscreen extent -1.5,-1.55 0.5,1.92, body extent -0.88,-1.52 0.87,1.53, height 1
TI-DGK8_N [mm] "SOP, 8-Leads, Body 3.1x3.1mm, Pitch 0.65mm, IPC Medium Density"
  oval 1.6x0.4 smd: 1(-2.1,0.975) 2(-2.1,0.325) 3(-2.1,-0.325) 4(-2.1,-0.975) 5(2.1,-0.975) 6(2.1,-0.325) 7(2.1,0.325) 8(2.1,0.975)
  silkscreen extent -2.22,-1.55 0.9,1.85, body extent -1.55,-1.55 1.55,1.55, height 1.1
TSOP65P280X145-8N [mm] "TSOP, 8-Leads, Body 2.90x1.60mm, Pitch 0.65mm, IPC Medium Density"
  oval 1x0.5 smd: 1(-1.35,0.975) 2(-1.35,0.325) 3(-1.35,-0.325) 4(-1.35,-0.975) 5(1.35,-0.975) 6(1.35,-0.325) 7(1.35,0.325) 8(1.35,0.975)
  silkscreen extent -1.47,-1.5 0.45,1.9, body extent -0.85,-1.5 0.85,1.5, height 1.45

## Part data
C1 C3 C6 C7 C8 C9 C10 C11 C12 C22 C23 C24 C30 C33 C34 C36: library part CMP-bf2276a55d9a60e5-19, "Ceramic capacitor SMD-0402 100nF /16V X7R# K +-10%, Samsung, RoHS"
C2 C5: library part CMP-122043-3, "Cap Ceramic 22uF 6.3V X5R 20% SMD 0603 85C Embossed T/R"
C4: library part CMP-173346-2, "Multilayer Ceramic Capacitors MLCC - SMD/SMT 50volts 6pF C0G"
C13: library part CMP-126494-2, "Cap Ceramic 0.0015uF 50V X7R 10% SMD 0402 125C Paper T/R"
C14: library part CMP-4106702-2, "Multilayer Ceramic Capacitors MLCC - SMD/SMT 10volts 0.47uF 10% X5R"
C15 C25: library part CMP-119553-3, "CAP CER 0.33UF 10V 10% X5R 0402"
C16 C20: library part CMP-19563753-2, "T&R / COMMERCIAL CHIP"
C17: library part CMP-8f214705328650e6-4, "Cap Ceramic 1uF 25V X5R 10% SMD 0402 85°C Cardboard T/R"
C18 C26: library part CMP-124577-2, "CAP CER 0.068UF 16V 10% X7R 0402"
C19: library part CMP-128367-2, "AVX   04025C332KAT2A   CAP, MLCC, X7R, 3.3NF, 50V, 0402"
C21 C35: library part CMP-7562325-2, "Cap Ceramic 1uF 16V X5R 10% SMD 0402 85C Paper T/R"
C27: library part CMP-8988077-2, "Multilayer Ceramic Capacitors MLCC - SMD/SMT 25volts 0.047uF 10% X7R 0402 SIZE"
C28 C29: library part CMP-3913259-2, "CAPACITOR, 0402, X7R, 50V, 220PF"
C31: library part CMP-128358-2, "AVX   04025A151JAT2A   CAP, MLCC, C0G/NP0, 150PF, 50V, 0402"
C32 C37: library part CMP-fd5e350784e62299-2, "Cap Ceramic 10uF 6.3V X5R 20% SMD 0402 85°C Paper T/R"
D1 D2 D3 D4 D5 D6 D7 D8 D9 D10: library part CMP-zjatvudan2pmebzuzrjd-1, "Bidirectional 3.3V (Max) 5V 14.1V 11.2A(8/20us) SOD-882 Diodes - ESD RoHS"
D11 D12: library part CMP-7093b92408b7af54-1, "LED SMD Top View Uni-Color Brilliant Green 518nm 0603 Pkg ø7T/R 3k\""
FB1: library part CMP-887293-3, "Chip Ferrite Bead for High Speed Signal lines, 330 Ohm, 400 mA, -55 to 125 degC, 2 x 1.25 x 1.05 mm SMD, Tape and Reel"
L1: library part CMP-6756ab2d39beb891-1, "MGV252012 - High Current Molded SMT Power Inductor"
P1: library part CMP-4e52859dc8429195-26, "Wire-To-Board Terminal Block, 2, 150 V, 10 A, 30 Awg, 16 Awg, 1.4 Mm"
Q1: library part CMP-832298-9, "MOSFET P-CH 30V 4A SOT23"
R1 R5 R20 R22 R23 R26 R27: library part CMP-3661304-2, "Thick Film Resistors - SMD 10K OHM 1%"
R2: library part CMP-3682312-2, "Thick Film Resistors - SMD 0402 88.7Kohms 1% Tol"
R3: library part CMP-3945506-8, "RES SMD 510K OHM 1% 1/16W 0402"
R4 R6 R28 R30 R32 R33: library part CMP-1900348-2, "RES SMD 0.0 OHM JUMPER 1/16W"
R7 R9: library part CMP-1900184-2, "RESISTOR, 0402 0.063W 1% 24K"
R8: library part CMP-2823544-2, "Res Thick Film 0402 1K Ohm 1% 0.063W(1/16W) ±100ppm/C Molded SMD Automotive Punched Paper T/R"
R10 R25: library part CMP-2823564-2, "Res Thick Film 0402 200K Ohm 1% 0.063W(1/16W) ±100ppm/C Molded SMD Automotive Punched Paper T/R"
R11 R12 R13 R17: library part CMP-3759242-3, "YAGEO   RC0402FR-13100KL   THICK FILM RESISTOR, 100KOHM, 62.5mW 1%"
R14: library part CMP-1856508-2, "RES SMD 6.8K OHM 1% 1/16W 0402"
R15: library part CMP-1853199-2, "YAGEO (PHYCOMP)   RC0402FR-0716KL   RESISTOR, 0402 0.063W 1% 16K"
R16: library part CMP-1853185-2, "RES SMD 11K OHM 1% 1/16W 0402"
R18: library part CMP-3656287-2, "Thick Film Resistors - SMD 0402 20Kohms 1% Tol"
R19 R24: library part CMP-1856416-2, "RES SMD 330K OHM 1% 1/16W 0402"
R21: library part CMP-9399996-2, "0402 8.2k ohms 1% automotive grade chip resistor"
R29: library part CMP-3679617-2, "Thick Film Resistors - SMD 0603 71.5ohms 1% Tol"
R31 R35 R38: library part CMP-7833283-2, "Thick Film Resistors 1/16W 1M ohm 1%"
R34: library part CMP-1873487-2, "RES SMD 680K OHM 1% 1/10W 0603"
R36: library part CMP-1867363-2, "RES SMD 220 OHM 1% 1/16W 0402"
R37: library part CMP-9105019-2, "Thick Film Resistors - SMD 0402 1% 1.0Kohm Anti-Sulfur"
SH1: library part CMP-da641787f57f05a3-1, "EMI SHIELDING, 26.87 X 26.87 X 2.01MM; Product Range: Two-Piece SMS Series; Gasket Material: Tin Plated Steel;..."
SW1 SW2: library part CMP-hgui3ccx9uakpoe7vbsx-5, "SPST 50mA @ 12VDC Vertical Round Button 260gf SMD Tactile Switches RoHS"
SW3: library part CMP-c7970ef1edec1850-5, "Switch Slide DPDT Side Slide 0.3A 30VDC PC Pins Thru-Hole Bulk"
U1: library part CMP-313bfeb3df46eefc-3, "Rx Txrx Mod Wifi Trace Ant SMD"
U2: library part CMP-70a5b95f396aaf62-2, "High Efficiency Single Inductor Buck-Boost Converter with 4A Switch 14-VSON -40 to 125"
U4: library part CMP-6bc4a2c881d8b403-1, "Digital Potentiometer 10kOhm 256POS Volatile Linear Automotive 8-Pin SOT-23 T/R"
U5: library part CMP-b2327839c6726df5-7, "3.3-V Vref, dual-output Vref & Vref/2 voltage reference 5-SOT-23-THIN -40 to 125"
U6 U9 U10: library part CMP-cf0503be886010c2-1, "5MHz 15V/us High Slew-Rate RRIO Operational Amplifier 8-Pin SOIC T/R"
U7: library part CMP-1215678-2, "Micropower Instrumentation Amplifier Single and Dual Versions, -40 to 85 degC, 8-pin SOP (DGK8), Green (RoHS & no Sb/Br)"

## Free pads (board coordinates)
  round 78.74 smd: ""(81.1,639.57) ""(81.1,739.57) ""(81.1,839.57) ""(181.1,639.57) ""(181.1,739.57) ""(181.1,839.57)
  rrect50% 196.85x70.87 smd far side: ""(109.25,310.43) ""(109.25,510.43) ""(109.25,410.43)
  rrect50% 196.85x70.87 smd: ""(109.25,410.43) ""(109.25,310.43) ""(109.25,510.43)
  round 55.12 smd: ""(849.41,582.68) ""(919.29,351.38) ""(949.8,256.89) ""(1289.37,138.78) ""(1305.12,689.96)

## Via types
v1: diameter 23.62, hole 11.81, Top Layer to Bottom Layer, tented both sides, 170 vias
v2: diameter 23.62, hole 11.81, Top Layer to Bottom Layer, 12 vias

## Nets (pads, with @x,y where several pads share a name; then routed paths per layer and width w, separated by ;. In a path a pad name is that pad's centre, name@x,y a point inside that pad or via, vN(x,y) a via of type N, cw(c..) or ccw(c..) an arc to the next point about the centre after c; other vN are vias at no path point)
3V3: C4.1 C5.1 C21.1 C22.1 FB1.1 R3.2 R5.1 R27.1 R38.2 U2.4 U2.5 U5.3 U5.4 | length 680.4
  Top Layer w6: v1(564.96,697.83) R38.2 ; C4.1@725.39,822.34 C5.1@725.39,845.47 ; v1@735.63,707.68 R3.2 ; v1(986.22,807.09) R5.1 ; v1(1227.36,968.5) R27.1@1256.89,968.5
  Top Layer w15: C21.1 974.61,621.15 991.14,637.68 991.14,638.67 998.8,646.32 998.8,670.61 991.14,678.26 v1(991.14,726.38) ; U5.3 U5.4 C21.1@975,617.72
  Top Layer w20: 649.11,859.74 C5.1 757.38,859.74 v1(770.67,873.03) ; C5.1@726.38,866.14 737.2,866.14 ; 736.71,866.63 v1(771.65,901.57) v1@771.65,874.02
  other v1: 735.24,707.68 766.73,1013.78 766.73,1039.37
ADC: C13.1 pad.@1305.12,689.96 R21.2 U1.9 U10.1 | length 408.6
  Top Layer w6: v1(1255.91,710.63) 1281.5,710.63 1305.12,687.01 1305.12,617.13 1292.32,604.33 1274.21,604.33 C13.1@1274.21,566.34 ; U10.1 C13.1@1280.83,559.73
  Bottom Layer w6: U1.9 1200.79,682.09 1229.33,710.63 v1(1255.91,710.63)
BOOT0: D7.1 pad.@181.1,739.57 U1.25 | length 430.3
  Top Layer w10: D7.1@363.19,445.67 v1(363.19,469.49)
  Bottom Layer w6: v1(181.1,739.57) 254.92,665.75 254.92,577.76 v1(363.19,469.49) 386.81,445.87 U1.25@414.37,445.87
BUT_A: C6.1 D1.2 R5.2 SW1.2 U1.8 | length 1478.1
  Top Layer w6: SW1.2 224.61,135.04 v1(246.06,156.5) ; v1(588.58,542.32) 588.58,587.6 v1(653.54,652.56) ; R5.2 C6.1@1057.68,773.62 ; v1(1058.07,738.19) C6.1
  Top Layer w10: v1(351.38,103.35) D1.2
  Bottom Layer w6: v1(246.06,156.5) 299.21,103.35 v1(351.38,103.35) 519.68,271.65 519.68,424.56 588.58,493.46 v1(588.58,542.32) ; v1(653.54,652.56) 683.07,682.09 845.82,682.09 859.8,696.07 880.36,696.07 886.47,689.96 991.14,689.96 1039.37,738.19 v1(1058.07,738.19) U1.8@1111.03,738.19
BUT_B: C34.1 D2.2 R27.2 SW2.2 U1.6 | length 604.7
  Top Layer w6: v1(1198.82,879.92) 1261.81,879.92 1291.54,909.65 C34.1 D2.2@1291.54,1029.13 ; D2.2@1291.34,1022.84 v1(1291.34,1058.07) ; v1(1342.52,1212.6) SW2.2@1342.52,1280.32
  Bottom Layer w6: U1.6 1128.35,832.09 1176.18,879.92 v1(1198.82,879.92) ; v1(1291.34,1058.07) 1342.52,1109.25 v1(1342.52,1212.6)
CABLE_SCREEN: pad.@109.25,310.43 pad.@109.25,410.43 pad.@109.25,510.43 U6.1 U6.2 | length 1009
  Top Layer w6: U6.1 U6.2 v1@550.59,590.16
  Bottom Layer w6: pad.@109.25,310.43 pad.@109.25,510.43 ; pad.@109.25,410.43 250.98,410.43 339.36,322.06 339.36,303.7 353.9,289.17 395.46,289.17 479.33,373.03 479.33,517.72 v1(551.18,589.57)
CS_N: U1.29 U4.6 | length 804.6
  Top Layer w6: v1(1058.07,631.89) 1072.83,646.65 1112.75,646.65 1135.12,624.29 U4.6
  Bottom Layer w6: U1.29 440.16,620.08 591.54,620.08 648.62,562.99 1015.75,562.99 1058.07,605.32 v1(1058.07,631.89)
DBG_PWR: pad.@181.1,639.57 SW3.3 SW3.6 | length 884.4
  Bottom Layer w20: SW3.3 SW3.6 85.28,1199.45 85.28,1034.57 85.63,1034.22 85.63,998.51 85.28,998.16 85.28,953.02 85.63,952.67 85.63,898.62 45.28,858.27 45.28,622.05 64.96,602.36 143.9,602.36 v1(181.1,639.57)
DVDD: C2.1 C3.1 FB1.2 R1.1 U1.2 | length 367
  Top Layer w6: FB1.2 916.34,956.1 R1.1
  Top Layer w20: FB1.2 C2.1 1060.04,1026.58 ; 1060.04,1026.58 v1(1069.88,1016.73) v1(1069.88,1040.35) 1069.88,1036.42 1060.04,1026.58
ELECTRODE_N: D4.2 pad.@109.25,410.43 R13.2 | length 396.5
  Top Layer w6: pad.@196.85,392.72 216.54,392.72 v1(247.05,362.2) ; v1(351.38,210.63) D4.2@385.63,210.63 ; D4.2 408.27,210.83 442.91,176.18 R13.2
  Bottom Layer w6: v1(247.05,362.2) 272.64,336.61 272.64,269.68 331.69,210.63 v1(351.38,210.63)
ELECTRODE_P: D5.2 pad.@109.25,310.43 R17.2 | length 446.2
  Top Layer w6: pad.@109.65,310.04 v1(247.05,310.04) ; v1(351.38,172.24) D5.2@385.04,172.24 ; D5.2 406.69,173.03 443.9,135.83 R17.2
  Bottom Layer w6: v1(247.05,310.04) 247.05,276.58 v1(351.38,172.24)
ELECTRODE_RLD: D3.2 pad.@109.25,510.43 R24.1 | length 450
  Top Layer w6: pad.@109.84,509.84 v1(239.17,509.84) ; v1(364.17,313.98) R24.1
  Top Layer w10: v1(364.17,313.98) D3.2
  Bottom Layer w6: v1(239.17,509.84) 266.73,482.28 266.73,411.42 v1(364.17,313.98)
ESP32_EN: C1.1 D8.1 pad.@81.1,639.57 R1.2 U1.3 | length 1425.4
  Top Layer w6: v1(364.17,605.32) 412.5,605.32 467.62,660.43 602.36,660.43 624.02,682.09 845.82,682.09 859.8,696.07 880.36,696.07 886.47,689.96 919.29,689.96 v1(956.2,726.87) ; v1(978.35,845.47) 978.35,846.36 1018.7,886.72 R1.2 1055.71,887.21 1059.05,890.55 v1(1059.06,919.29)
  Top Layer w10: v1(364.17,605.32) D8.1
  Bottom Layer w6: v1(81.1,639.57) 130.91,689.37 130.91,738.19 157.1,764.38 205.11,764.38 v1(364.17,605.32) ; v1(956.2,726.87) 956.2,823.33 v1(978.35,845.47) ; v1(1059.06,919.29) 1059.06,937.99 U1.3@1090.55,969.49
ESP32_RX: D10.1 pad.@81.1,739.57 U1.34 | length 503.4
  Top Layer w10: D10.1 v1(364.17,781.5)
  Bottom Layer w6: v1(81.1,739.57) 146.86,805.32 287.2,805.32 309.9,782.62 v1@364.17,782.62 ; v1(364.17,781.5) v1@364.17,782.62 ; U1.34 411.27,882.09 372.89,843.71 365.71,843.71 351.17,829.17 351.17,808.62 364.17,795.62 v1@364.17,782.62
ESP32_TX: D9.1 pad.@81.1,839.57 U1.35 | length 431.8
  Top Layer w10: v1(363.19,869.09) D9.1
  Bottom Layer w6: v1(81.1,839.57) 110.63,869.09 v1(363.19,869.09) 363.19,909.45 385.83,932.09 U1.35@419.59,932.09 ; U1.35@419.25,940.99 U1.35@420.28,939.96
FILTER_OUT: C14.2 C15.1 pad.@1289.37,138.78 R16.2 R20.1 U10.7 | length 436
  Top Layer w6: R16.2 1155.51,414.37 1230.83,339.05 U10.7 C14.2@1230.83,158.78 ; C14.2 1238.39,138.78 pad.@1289.37,138.78
GND: C1.2 C2.2 C3.2 C5.2 C6.2 C7.2 C8.2 C9.2 C10.2 C11.2 C12.2 C21.2 C22.2 C23.2 C24.2 C32.2 C33.2 C34.2 C35.2 C36.2 C37.2 D1.1 D2.1 D3.1 D4.1 D5.1 D6.1 D7.2 D8.2 D9.2 D10.2 D11.2 D12.2 P1.2 pad.@181.1,839.57 Q1.1 R2.1 R6.2 R30.1 R35.2 SH1.1 SW1.1 SW2.1 U1.1 U1.15 U1.38 U1.39 U2.2 U2.15 U4.3 U5.2 U6.4 U7.4 U9.4 U10.4 | length 2426.7
  Top Layer w6: SW1.1 v1@52.95,145.47 ; v1(74.8,202.76) D12.2 ; R30.1 444.49,504.92 459.25,490.16 U6.4 v1(550.2,490.16) ; v1(418.31,243.11) C9.2@418.31,266.14 ; U2.15@568.7,777.56 U2.15@568.7,796.26 ; U2.15@568.7,901.57 U2.15@568.7,920.28 ; U2.15@586.81,777.56 U2.15@586.81,796.26 ; U2.15@586.81,901.57 U2.15@586.81,920.28 ; U2.15@604.92,777.56 U2.15@604.92,796.26 ; U2.15@604.92,901.57 U2.15@604.92,920.28 ; U2.15@623.03,777.56 U2.15@623.03,796.26 ; U2.15@623.03,901.57 U2.15@623.03,920.28 ; U9.4@719.49,422.17 v1(719.49,451.77) ; U7.4 v1(807.09,117.13) ; C10.2 v1@808.27,618.9 ; C12.2 v1@1017.13,131.3 ; v1@1017.91,850.2 C1.2 C6.2 ; C33.2 1130.32,798.28 1170.62,838.58 v1(1171.26,838.58) ; U10.4 1130.83,487.28 v1(1169.29,448.82) ; U4.3 C33.2@1135.12,766.85 ; SW2.1@1183.86,1293.31 1282.48,1293.31 1307.09,1268.7 1307.09,1185.04 D11.2 SH1.1@1297.24,1108.27 ; v1(1222.44,914.37) 1242.13,914.37 C34.2 ; v1(1265.16,199.41) C11.2
  Top Layer w10: SH1.1@320.87,659.25 D8.2 ; SH1.1@323.82,724.61 D10.2 D10.2@363.39,725.39 ; v1(351.38,245.08) 376.77,245.08 D4.1 ; D9.2 v1(363.19,951.77) D6.1 ; D3.1 D7.2 ; v1(375.98,818.9) 385.24,828.15 C32.2 C37.2 488.57,828.15 v1(498.06,837.64) ; D5.1 407.28,126.38 D1.1 ; D1.1@413.19,97.44 v1(437.99,97.44) ; C7.2 v1(480.31,918.31) ; U2.15@622.05,809.55 U2.2 ; C8.2@643.31,727.36 v1(670.28,727.36) 687.89,727.36 R2.1 ; C5.2@697.83,926.08 v1(697.83,956.69) ; C5.2 734.74,912.89 v1(749.02,927.17) ; C5.2@724.41,926.28 v1(724.41,956.69) ; v1(813.98,537.4) 835.24,537.4 C24.2 ; C36.2 R35.2@902.95,928.74 ; 903.34,950.99 903.34,928.35 R35.2 ; U5.2@937.01,417.91 v1(937.01,454.72) ; v1(939.96,537.4) C22.2 ; v1(941.93,973.43) C2.2 v1(983.27,935.04) ; C2.2@1001.38,985.63 1034.45,985.63 v1(1034.45,957.68) ; C3.2@1042.72,983.27 v1(1064.96,983.27) ; v1@1240.16,1022.64 D2.1
  Top Layer w15: C23.2@938.19,658.46 v1(969.49,658.46) ; C22.2 C21.2 C23.2@939.96,656.69
  Top Layer w20: v1(697.83,956.69) v1(724.41,956.69) ; C5.2 711.02,954.33
  other v1: 241.14,27.56 32.48,30.51 844.49,43.31 967.52,43.31 1097.44,43.31 1229.33,43.31 458.66,44.29 601.38,44.29 720.47,44.29 309.06,46.26 1364.17,46.26 1017.72,131.89 53.15,145.67 309.06,175.2 1366.14,188.98 27.56,252.95 584.65,287.4 308.07,291.34 1366.14,336.61 1168.31,362.2 364.17,393.7 298.23,441.93 1028.54,447.83 241.14,449.8 598.43,449.8 1366.14,476.38 218.5,572.83 300.2,572.83 27.56,573.82 1366.14,587.6 809.06,618.11 1367.13,715.55 309.06,718.5 1254.92,758.86 252.95,780.51 580.12,809.55 612.6,809.55 1366.14,836.61 181.1,839.57 308.07,839.57 595.87,848.92 1017.72,850.39 1289.37,872.05 579.13,889.27 611.61,889.27 27.56,898.62 1366.14,965.55 307.09,968.5 877.95,973.43 697.83,1008.86 1236.22,1022.64 728.35,1052.17 247.05,1056.1 308.07,1069.88 1365.16,1094.49 661.42,1100.39 373.03,1101.38 500.98,1101.38 810.04,1101.38 946.85,1101.38 1064.96,1101.38 1224.41,1102.36 27.56,1114.17 197.83,1115.16
  other v2: 804.13,722.44 859.25,722.44 776.57,750 831.69,750 886.81,750 804.13,778.54 859.25,778.54 776.57,806.1 831.69,806.1 886.81,806.1 804.13,832.68 859.25,832.68
GRN_LED: R36.2 U1.11 | length 623.4
  Top Layer w6: v1(1192.91,943.9) R36.2
  Bottom Layer w6: U1.11 1216.93,582.09 1318.9,684.06 1318.9,880.91 1256.11,943.69 1193.12,943.69 v1(1192.91,943.9)
INAMP_OUT: C27.1 C30.1 pad.@919.29,351.38 R14.1 R18.2 R19.2 U7.6 | length 686.5
  Top Layer w6: R19.2 777.56,430.12 856.3,351.38 919.29,351.38 v1(956.69,313.98) 975.39,332.68 R14.1 C30.1 ; v1(867.13,197.84) 867.13,156.5 880.91,142.72 U7.6 ; C27.1 R18.2@1034.45,371.06
  Bottom Layer w6: v1(867.13,197.84) 956.69,287.4 v1(956.69,313.98)
MISO: U1.31
MOSI: U1.37 U4.5 | length 931.8
  Top Layer w6: v1(931.1,821.85) 1019.21,733.74 1019.21,634.33 1047.24,606.3 1101.02,606.3 U4.5
  Bottom Layer w6: U1.37@441.34,1045.28 450.49,1036.12 453.74,1039.37 706.05,1039.37 756.46,988.97 793.51,988.97 931.1,851.38 v1(931.1,821.85)
NetC8_1: C8.1 R4.2 U2.1 U2.12 | length 369.3
  Top Layer w6: R4.2@452.76,792.32 v1(481.3,792.32) 499.02,810.04 509.19,810.04 U2.12@528.38,829.23 ; C8.1 605.71,727.06 627.66,749.02 640.75,749.02 v1(654.53,762.8) ; v1@654.92,763.19 U2.1
  Bottom Layer w6: v1(481.3,792.32) 510.83,762.8 v1(654.53,762.8)
NetC14_1: C14.1 C15.2 R10.2 R14.2 R15.1 | length 333
  Top Layer w6: R14.2@1000.99,292.32 R15.1 1000.99,229.68 1065.51,165.15 1123.31,165.15 1149.61,191.44 R10.2 C15.2 C14.1
NetC16_1: C16.1 C19.2 C28.1 R13.1 | length 121.5
  Top Layer w6: R13.1 C16.1@619.49,176.18
NetC16_2: C16.2 R11.2 U7.2 | length 94.9
  Top Layer w6: C16.2@662.01,168.31 U7.2
NetC17_1: C17.1 R19.1 U6.6 | length 89.2
  Top Layer w6: U6.6 774.61,540.16 R19.1@774.61,507.28
NetC17_2: C17.2 U6.7 U7.5 | length 759.3
  Top Layer w6: v1(657.48,323.82) 631.89,349.41 631.89,558.07 663.98,590.16 U6.7 765.16,590.16 C17.2 ; v1(864.17,117.13) U7.5
  Bottom Layer w6: v1(657.48,323.82) v1(864.17,117.13)
NetC18_2: C18.2 C27.2 C30.2 R15.2 U10.5 | length 170.7
  Top Layer w6: R15.2 1075,256.89 1075.79,257.68 C30.2 ; C27.2 1034.65,298.03 C30.2 ; U10.5@1123.03,298.03 C30.2
NetC19_1: C19.1 C20.2 C29.1 R17.1 | length 122.4
  Top Layer w6: R17.1 C20.2
NetC20_1: C20.1 R12.2 U7.3 | length 94.9
  Top Layer w6: C20.1@662.01,142.72 U7.3
NetC25_2: C25.2 C26.2 R16.1 U10.3 | length 241.3
  Top Layer w6: C26.2 1076.38,488.98 R16.1@1076.38,448.23 ; C25.2 1080.62,488.58 1106.3,514.26 1106.3,530.51 1117.13,541.35 1161.41,541.35 1180.83,521.93 U10.3
NetC31_1: C31.1 R24.2 R31.2 U9.7 | length 151.3
  Top Layer w6: R31.2 444.29,354.33 R24.2@444.29,314.57 ; C31.1 477.05,321.58 U9.7
NetC31_2: C31.2 R22.1 R31.1 U9.6 | length 140.7
  Top Layer w6: R22.1 409.45,391.73 412.79,388.39 C31.2 458.14,375.13 504.33,375.13 U9.6
NetC35_1: C35.1 R28.1 R30.2 U6.3 | length 137.2
  Top Layer w6: R30.2@407.28,540.16 C35.1@444.88,540.16 ; C35.1 C35.1@444.88,540.16 ; R28.1@444.88,580.71 C35.1@444.88,540.16 ; U6.3 C35.1@444.88,540.16
NetD6_2: D6.2 Q1.3 SW3.2 SW3.5 | length 542.9
  Top Layer w14: D6.2 Q1.3@486.42,1004.72
  Top Layer w20: D6.2@363.19,1008.86 v1(363.19,1041.34)
  Bottom Layer w20: SW3.2 184.06,1196.85 241.14,1139.76 283.18,1139.76 339.88,1083.06 339.88,1064.65 v1(363.19,1041.34)
NetD11_1: D11.1 R36.1 | length 210.6
  Top Layer w6: R36.1 v1(1192.91,1040.35) ; v1(1192.91,1175.2) D11.1
  Bottom Layer w6: v1(1192.91,1040.35) v1(1192.91,1175.2)
NetD12_1: D12.1 R37.1 | length 1024.3
  Top Layer w6: D12.1 v1(210.63,202.76) ; v1(1051.18,110.24) R37.1
  Bottom Layer w6: v1(210.63,202.76) 210.63,126.97 264.97,72.63 1013.57,72.63 v1(1051.18,110.24)
NetL1_1: L1.1 U2.8 U2.9 | length 101
  Top Layer w10: U2.9 U2.8 536.81,967.91 545.67,976.77 L1.1@554.53,976.77
NetL1_2: L1.2 U2.6 U2.7 | length 100.8
  Top Layer w10: L1.2@637.2,975.98 647.05,975.98 654.92,968.11 U2.7 U2.6
NetR4_1: R4.1 R6.1 U2.13 | length 119.9
  Top Layer w6: R4.1 R6.1@491.14,754.92 ; R6.1@493.11,756.89 509.84,773.62 509.84,794.29 525.1,809.55 U2.13
NetR7_2: R7.2 R9.1 U9.3 | length 268.2
  Top Layer w6: U9.3 795.75,371.58 840.55,326.77 840.55,246.06 ; R7.2 840.55,246.06 ; R9.1 840.55,246.06
NetR18_1: R18.1 R20.2 R25.2 U10.6 | length 241.5
  Top Layer w6: R18.1 1115.16,375 1180.83,309.33 U10.6 R20.2@1180.83,241.42 ; R25.2 R20.2
NetR32_2: R32.2 U5.5 | length 55.1
  Top Layer w15: U5.5 R32.2
NetR33_2: R33.2 U5.1 | length 53.7
  Top Layer w15: R33.2 U5.1
PA0: R8.1 R23.1 U4.8 | length 96.9
  Top Layer w6: R8.1 R23.1 1165.36,570.13 1186.3,591.08 U4.8
PB0: R21.1 R26.1 U4.7 | length 210.2
  Top Layer w6: U4.7 1160.71,640.04 1177.2,656.53 v1(1182.14,656.53) ; R26.1 R21.1@1274.21,637.8 ; 1255.91,638.78 v1(1255.91,676.18)
  Bottom Layer w6: v1(1182.14,656.53) 1200.76,656.53 1220.41,676.18 v1(1255.91,676.18)
PG: R38.1 U2.14 | length 58.2
  Top Layer w6: R38.1@536.81,731.69 U2.14
PW0: C13.2 R23.2 R26.2 U4.1 U10.2 | length 305
  Top Layer w6: U4.1 1186.3,687.46 1209.65,664.12 1209.65,593.51 C13.2@1236.81,566.34 ; R23.2@1200.2,566.34 C13.2@1236.81,566.34 ; U10.2 C13.2@1230.83,557.6 ; R26.2 C13.2@1236.81,566.34 ; C13.2 C13.2@1236.81,566.34
RED_LED: R37.2 U1.16 | length 378.5
  Top Layer w6: R37.2 v1(1147.64,110.24)
  Bottom Layer w6: U1.16@947.44,374.32 1147.64,174.12 v1(1147.64,110.24)
RG1: R7.1 R29.1 U7.1 | length 125
  Top Layer w6: U7.1 756.89,219.49 R7.1 783.46,264.76 R29.1
RG2: R9.2 R29.2 U7.8 | length 124.2
  Top Layer w6: R29.2 897.64,264.76 R9.2 922.24,221.46 U7.8
RLD_BUF: R22.2 U9.1 U9.2 | length 390.4
  Top Layer w6: R22.2 447.25,427.17 477.76,396.65 538.39,396.65 631.18,303.86 663.46,271.58 U9.1 U9.2
SCK: U1.30 U4.4 | length 824.7
  Top Layer w6: v1(1044.29,705.71) 1068.9,705.71 1084.29,721.1 U4.4
  Bottom Layer w6: U1.30 439.96,682.09 473.43,648.62 611.22,648.62 670.28,589.57 1014.42,589.57 1032.69,607.83 1032.69,694.1 v1(1044.29,705.71)
VBATT: P1.1 SW3.1 SW3.4 | length 355.9
  Top Layer w10: P1.1 P1.1@145.47,1069.88
  Top Layer w20: P1.1@145.47,1069.88 198.82,1069.88 282.48,1153.54 SW3.1
VBATT_MON: C36.1 R34.2 R35.1 U1.7 | length 340.5
  Top Layer w6: R34.2 R35.1@897.64,900.59 ; R35.1 v1(937.01,892.72)
  Bottom Layer w6: v1(937.01,892.72) 949.8,879.92 1031.5,879.92 1059.06,852.36 1059.06,823.82 U1.7@1100.79,782.09
VBATT_SW: C7.1 C32.1 C37.1 Q1.2 R34.1 U2.10 U2.11 | length 622.4
  Top Layer w6: v1(774.61,949.8) R34.1
  Top Layer w20: C7.1 409.84,877.17 C32.1 C37.1 465.55,869.45 498.03,869.45 ; C7.1@410.43,918.9 Q1.2 ; v1(498.03,888.78) 498.03,869.45 ; 540.35,858.27 522.41,858.27 511.23,869.45 498.03,869.45
  Bottom Layer w6: v1(498.03,888.78) 590.76,981.5 742.91,981.5 v1(774.61,949.8)
VCC: C9.1 C10.1 C11.1 C12.1 C23.1 C33.1 pad.@849.41,582.68 R32.1 U4.2 U6.8 U7.7 U9.8 U10.8 | length 634.5
  Top Layer w6: C9.1@447.52,271.58 U9.8 ; v1(452.76,243.11) C9.1@452.76,266.34 ; U6.8 718.27,640.28 733.79,640.28 747.05,653.54 C10.1 v1(809.06,653.54) ; pad.@849.41,582.68 880.91,614.17 R32.1 ; U7.7 C12.1@981.89,168.31 ; C12.1@985.24,171.65 v1@1017.32,171.65 ; U4.2 C33.1@1160.71,767.4 ; C33.1@1171.26,777.95 v1(1171.26,804.13) ; U10.8 1280.83,272.32 1299.8,253.35 C11.1 v1(1299.8,199.21)
  Top Layer w15: R32.1 C23.1@900.2,657.09
  Top Layer w20: v1@868.11,648.62 v1@868.11,669.29 ; v1(870.08,646.65) 882.38,658.96 ; 870.08,659.45 C23.1 ; v1(870.08,671.26) 871.06,671.26 882.87,659.45
  other v1: 1017.72,171.26
VFB: C4.2 R2.2 R3.1 U2.3 | length 125.6
  Top Layer w6: U2.3 679.13,829.23 698.23,810.14 R2.2 R3.1
VREF: C18.1 C24.1 C25.1 C26.1 C28.2 C29.2 pad.@949.8,256.89 R8.2 R10.1 R11.1 R12.1 R25.1 R28.2 R33.1 U6.5 U9.5 | length 612.7
  Top Layer w6: v1(375.98,573.82) R28.2@406.5,573.82 ; U9.5 v1@504.33,449.21 ; C29.2@539.17,100.39 v1(570.87,100.39) ; C28.2@539.17,211.61 v1(570.87,211.61) ; v1(664.37,100.39) R12.1@692.91,100.39 ; v1(664.37,211.61) R11.1@691.93,211.61 ; v1(669.29,490.16) U6.5 ; pad.@949.8,256.89 v1(976.38,214.57) ; C26.1 1057.09,522.84 ; C18.1 v1(1075.79,189.96) R10.1@1112.21,189.96 ; C25.1 1076.38,522.84 1057.09,522.84 ; R8.2@1088.58,560.04 v1(1057.09,560.04) 1057.09,522.84 ; R10.1 R25.1
  Top Layer w15: R33.1 C24.1
  Top Layer w20: 826.18,491.54 v1(813.98,479.33) v1(813.98,502.95) 825.39,491.54 C24.1
  other v1: 504.92,449.8
pads on no net: U1.4 U1.5 U1.10 U1.12 U1.13 U1.14 U1.17 U1.18 U1.19 U1.20 U1.21 U1.22 U1.23 U1.24 U1.26 U1.27 U1.28 U1.32 U1.33 U1.36

## Polygon pours and split planes (outlines as drawn)
GND on Power Layer 2 "GND Layer" (solid, remove dead copper, pour order 2): 0,0 1417.32,0 1417.32,1131.89 0,1131.89
3V3 on Power Layer 1 "3V3 Plane" (solid, remove dead copper, pour order 7): 0,574.8 279.53,574.8 279.53,692.91 1000,692.91 1125.98,818.9 1165.35,858.27 1295.28,858.27 1417.32,858.27 1417.32,1131.89 0,1131.89
VREF on Power Layer 1 "VREF Plan" (solid, remove dead copper, pour order 5): 0,0 952.76,0 952.76,177.17 952.76,188.98 1023.62,188.98 1035.43,188.98 1035.43,110.24 1220.47,110.24 1228.35,110.24 1259.84,141.73 1263.78,145.67 1263.78,255.91 1263.78,637.8 1248.03,653.54 1212.6,688.98 1196.85,688.98 1141.73,688.98 1110.24,657.48 1066.93,614.17 1027.56,614.17 397.64,614.17 381.89,598.43 359.25,575.79 359.25,376.97 374.02,362.2 437.01,299.21 464.57,299.21 476.38,299.21 476.38,224.41 385.83,224.41 338.58,271.65 279.53,330.71 279.53,429.13 279.53,566.93 279.53,570.87 0,570.87
VCC on Power Layer 1 "VCC Plane" (solid, remove dead copper, pour order 3): 472.44,228.35 409.45,228.35 385.83,228.35 283.46,330.71 283.46,688.98 1007.87,688.98 1173.23,854.33 1417.32,854.33 1417.32,0 956.69,0 956.69,185.04 1031.5,185.04 1031.5,137.8 1062.99,106.3 1228.35,106.3 1267.72,145.67 1267.72,641.73 1212.6,696.85 1141.73,696.85 1062.99,618.11 984.25,618.11 763.78,618.11 393.7,618.11 354.33,578.74 354.33,374.02 433.07,295.28 472.44,295.28
GND on Bottom Layer "Bottom GND" (solid, remove dead copper, pour order 9): 0,0 0,1125.98 1417.32,1125.98 1417.32,0
GND on Top Layer "Top GND" (solid, remove dead copper, pour order 11): 0,0 311.02,0 307.09,3.94 307.09,688.98 1374.02,688.98 1374.02,1118.11 423.33,1118.11 411.52,1129.92 0,1129.92

## Keep-outs
Keep-Out Layer:
  lines w10: 0,39.37 ccw(c39.37,39.37) 39.37,0 1377.95,0 ccw(c1377.95,39.37) 1417.32,39.37 1417.32,1338.58 ccw(c1377.95,1338.58) 1377.95,1377.95 39.37,1377.95 ccw(c39.37,1338.58) 0,1338.58 0,39.37

## Other copper
Top Layer:
  rectangle net 3V3: 757.87,1006.89 788.39,1046.26
  pour cut-out: 757.87,334.65 925.2,334.65 925.2,246.06 944.88,226.38 944.88,198.82 735.24,198.82 735.24,226.38 757.87,249.02
  pour cut-out: 512.8,953.74 678.15,953.74 678.15,1063.98 512.8,1063.98
  pour cut-out: 977.36,702.76 326.77,702.76 326.77,674.21 977.36,674.21
Power Layer 2:
  pour cut-out: 977.36,702.76 325.79,702.76 325.79,674.21 977.36,674.21
Bottom Layer:
  rectangle net DVDD: 1067.91,1014.76 1095.47,1045.28
  pour cut-out: 977.36,702.76 393.7,702.76 393.7,674.21 977.36,674.21

## Silkscreen, mask and mechanical layers (free items; w line width, h text height)
Top Overlay:
  text "B" at 1354.33,1150.59 h48
  text "+" at 39.37,1098.43 h48 r180
  text "-" at 32.48,961.61 h48 r270
  text "ADC" at 1226.38,737.2 h36
  text "+V" at 809.06,626.97 h36
  text "R" at 219.49,525.59 h48 r270
  text "N" at 219.49,426.18 h48 r270
  text "IA" at 824.8,346.46 h36
  text "P" at 218.5,323.82 h48 r270
  text "REF" at 962.6,187.99 h36
  text "A" at 30.51,179.13 h48
  text "FTR" at 1159.45,80.71 h36
Bottom Overlay:
  text "ON" at 245.08,1290.35 h48 r180
  text "OFF" at 29.53,1289.37 h48 r180
  text "+" at 39.37,1098.43 h48 r180
  text "-" at 32.48,961.61 h48 r270
Mechanical 1:
  the board outline again, w10